# Allegro board Netduino3Ethernet_17Dec16.brd
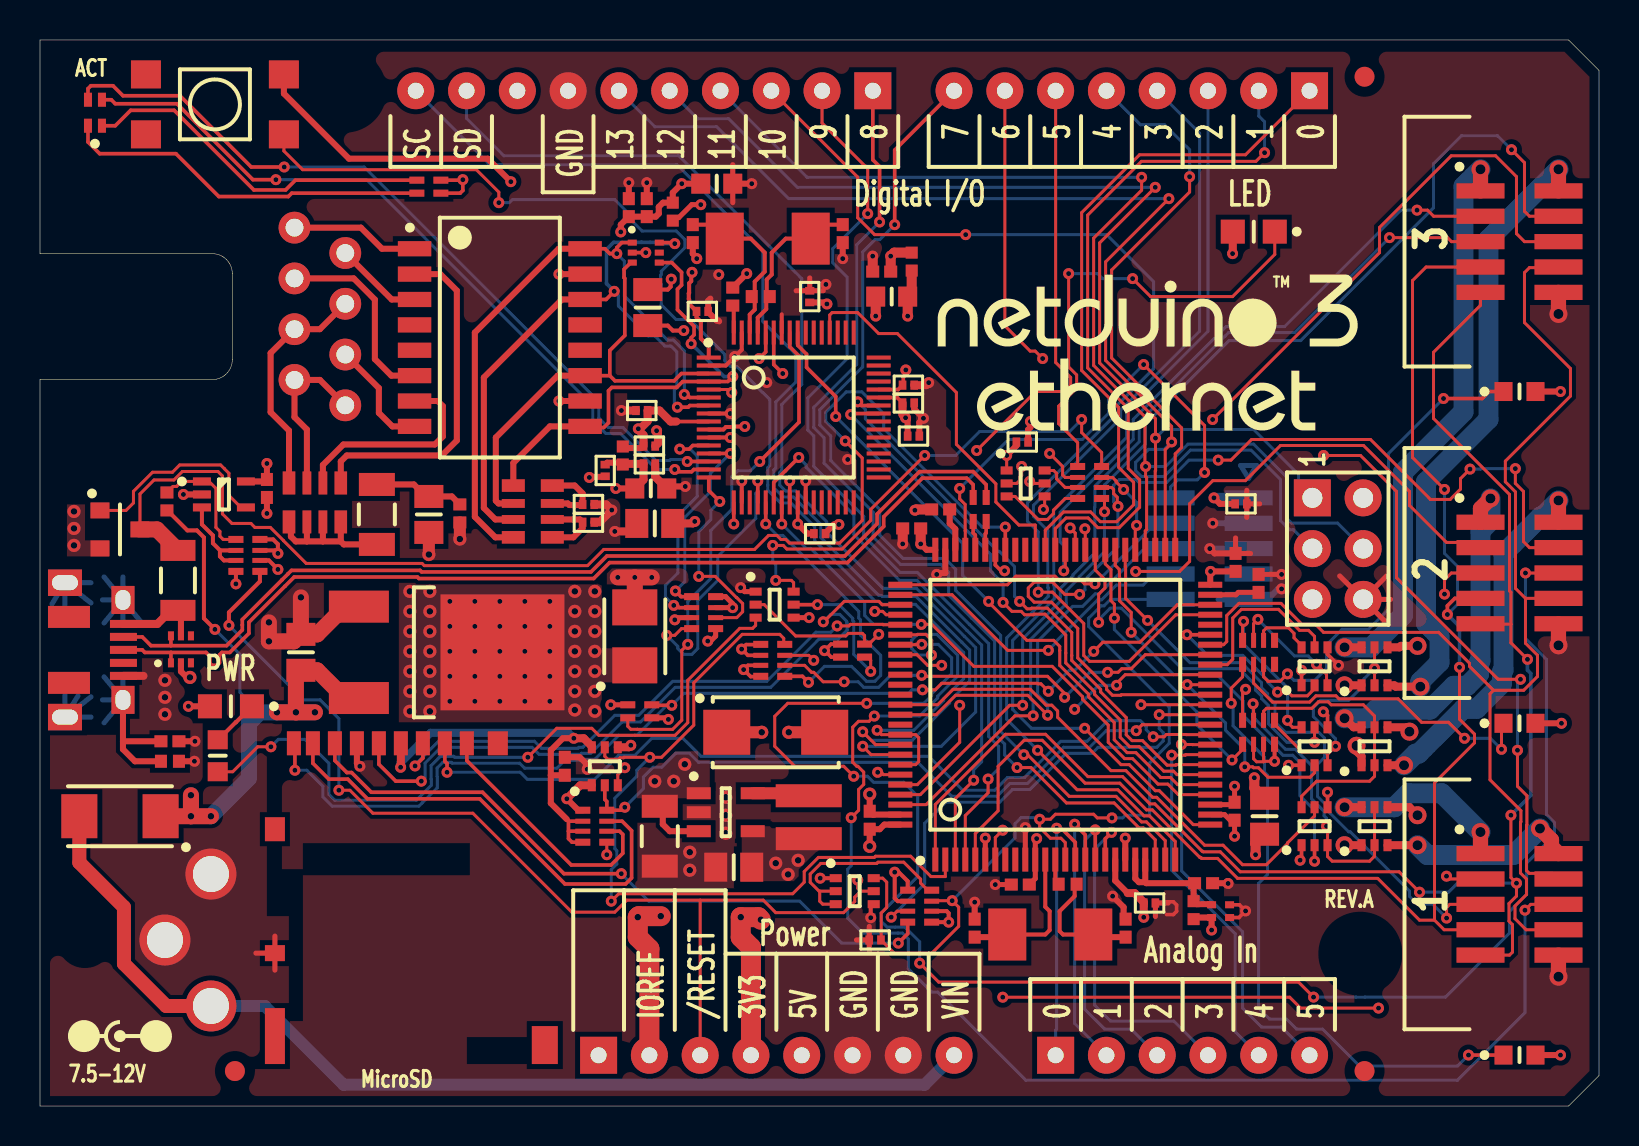
[diagram p0: board, top side]
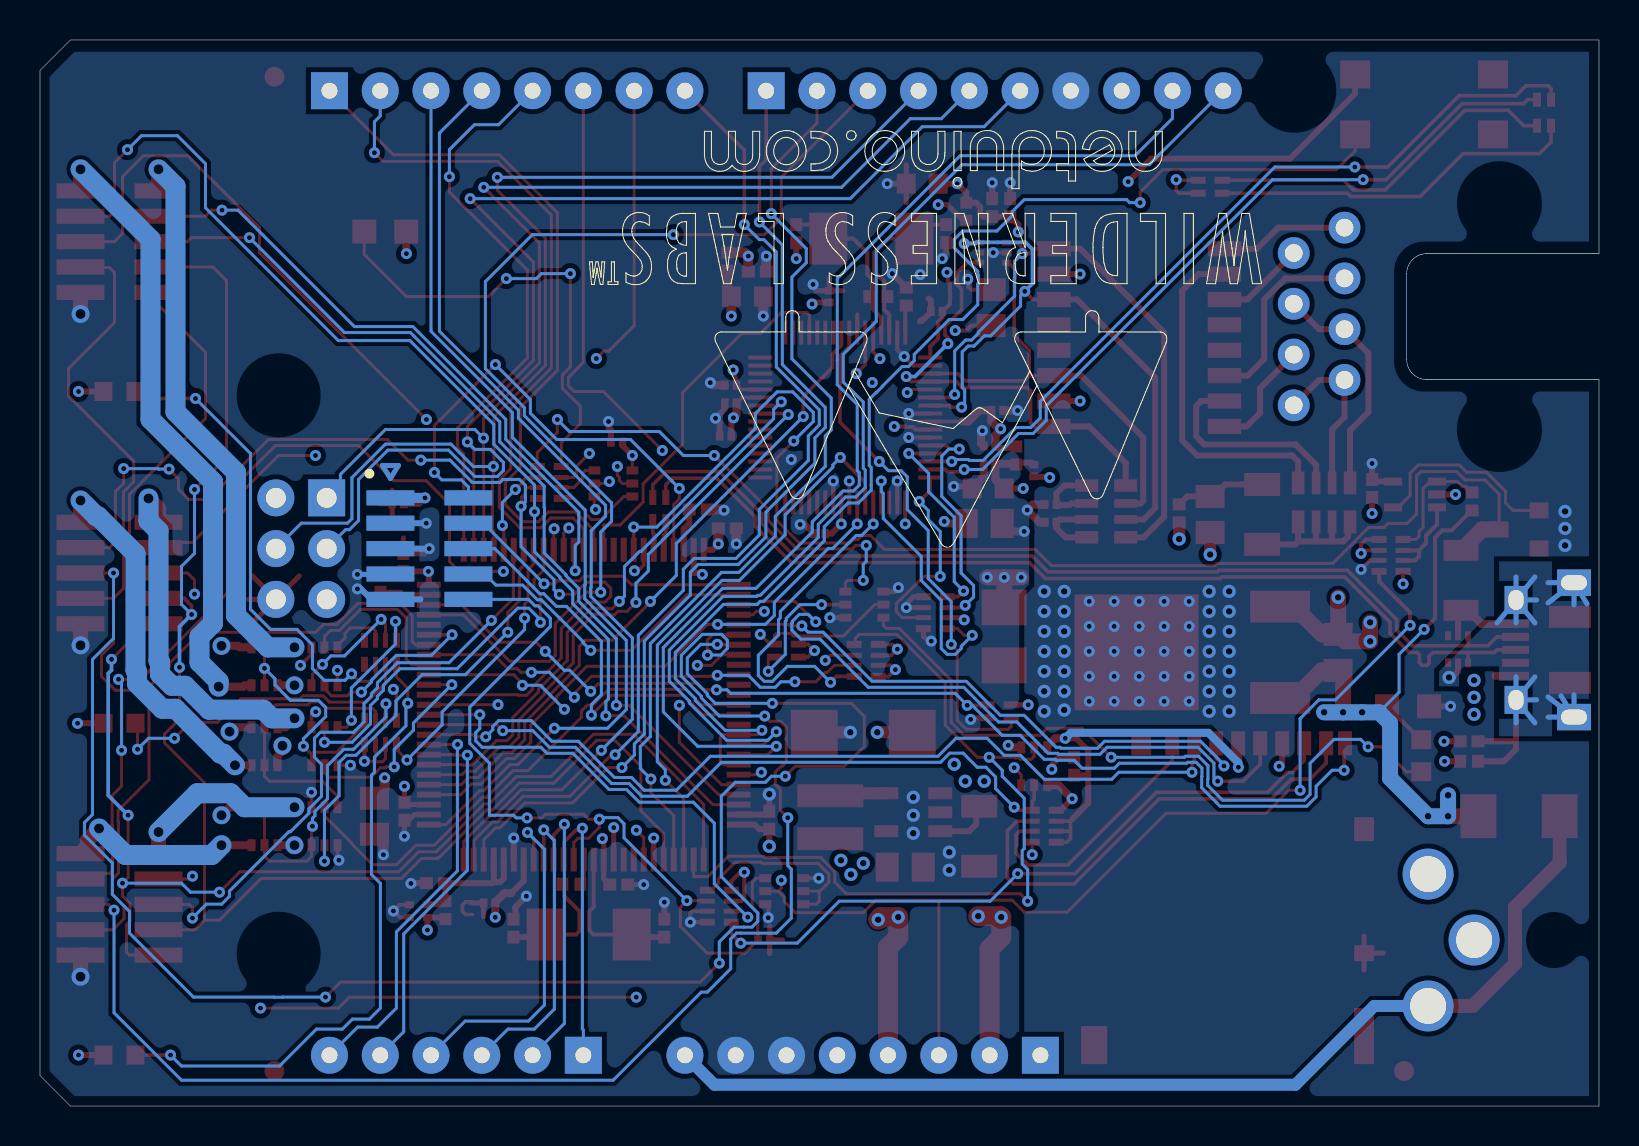
[diagram p1: board, bottom side, seen from below]

Outline 77.98 x 53.34 mm; copper layers: TOP, L2-GND, L3-PWR, BOTTOM. Coordinates in mm from the lower left corner of the outline.
Outline path: 0,53.34 0,42.65 8.62,42.65 arc(9.33,42.35) 9.62,41.65 9.62,37.35 arc(9.33,36.64) 8.62,36.35 0,36.35 0,0 76.45,0 77.98,1.52 77.98,51.82 76.45,53.34 0,53.34

## Placement (name value [footprint] x y rotation side)
C1  22uF  [CAPC3216X180N]  31 13.5 270 top
C2  10uF  [CAPC2012X125N]  13.05 22.7 90 top
C4  22uF  [CAPC2012X125N]  34.7 11.95 180 top
C5  0.1uF  [CAPC1005X55N]  58.2 11.15 0 top
C6  0.1uF  [CAPC1005X55N]  11.35 30.9 270 top
C7  1uF  [GNM1M2]  59.05 9.75 0 top
C9  0.1uF  [CAP-0201]  55.5 10.16 0 top
C10  0.1uF  [CAPC1005X55N]  49.03 11.08 180 top
C11  0.1uF  [CAPC1005X55N]  59.75 14.75 270 top
C12  0.1uF  [CAPC1005X55N]  59.8 27.2 90 top
C13  0.1uF  [CAPC1005X55N]  43.6 28.9 180 top
C14  0.1uF  [CAPC1005X55N]  41.5 14.3 90 top
C16  2.2uF  [CAPC1005X55N]  45.05 29.85 180 top
C17  2.2uF  [CAPC1005X55N]  60.95 26.15 90 top
C18  18pF  [CAPC1005X55N]  46.75 8.9 90 top
C19  18pF  [CAPC1005X55N]  54.3 8.9 90 top
C20  4.7nF  [CAPC1005X55N]  6.5 18.25 180 top
C21  100uF  [CAPMP6032X280N]  36.8 18.7 0 top
C22  0.1uF  [CAPC1005X55N]  26.25 17 90 top
C23  22uF  [CAPC2012X125N]  30.75 29.15 180 top
C24  0.1uF  [CAP-0201]  30.1 34.8 180 top
C25  22uF  [CAPC2012X125N]  30.4 39.95 90 top
C26  0.1uF  [CAP-0201]  33.13 39.76 0 top
C27  4.7uF  [CAPC1608X90N]  33.85 46.15 0 top
C28  1uF  [CAPC1005X55N]  30.35 44.95 90 top
C29  0.1uF  [CAPC1005X55N]  29.45 44.95 90 top
C30  0.1uF  [CAP-0201]  38.5 40.5 90 top
C31  0.1uF  [CAP-0201]  43.43 35.18 0 top
C32  0.1uF  [CAP-0201]  30.48 32.13 0 top
C33  0.1uF  [CAPC1005X55N]  42.1 41.75 180 top
C34  4.7uF  [CAPC1608X90N]  42.6 40.5 180 top
C35  0.1uF  [CAP-0201]  28.27 31.8 270 top
C36  4.7uF  [CAPC1608X90N]  30.55 30.9 0 top
C37  18pF  [CAPC1005X55N]  40.15 43.65 270 top
C38  18pF  [CAPC1005X55N]  32.65 43.65 270 top
C39  0.1uF  [CAP-0201]  27.43 30.1 0 top
C40  1nF  [CAPC3216X180N]  16.85 29.6 90 top
C41  0.1uF  [CAPC2012X125N]  19.45 29.6 90 top
C42  22uF  [CAPC2012X125N]  61.25 14.5 270 top
C43  47uF  [F931A476MBA]  29.75 23.5 90 top
C44  0.1uF  [CAP-0201]  41.77 8.31 180 top
C45  0.1uF  [CAP-0201]  60.07 30.13 0 top
C46  0.1uF  [CAP-0201]  49.13 33.22 0 top
C47  0.1uF  [CAP-0201]  39 28.64 0 top
C48  0.1uF  [CAP-0201]  43.43 36.07 0 top
C49  0.1uF  [CAP-0201]  43.69 33.52 0 top
C50  0.1uF  [CAP-0201]  30.48 33.02 0 top
C51  0.1uF  [CAP-0201]  27.43 29.21 0 top
D1  WHITE  [LEDC2012X110N]  9.55 20 180 top
D2  BLUE  [LEDC2012X110N]  60.71 43.75 180 top
D3  SS15E-TP  [SS15-TP]  4 14.5 180 top
D4  -  [SP3003-04XTG]  7.05 22.85 90 top
D5  BLUE  [LEDC1608X80N]  74 2.55 0 top
D6  BLUE  [LEDC1608X80N]  74 19.15 0 top
D7  BLUE  [LEDC1608X80N]  74 35.75 0 top
D8  -  [SP3003-04XTG]  30.3 42.7 0 top
D9  GREEN  [LTST-C295]  2.75 49.7 90 top
F1  MF-NSMF075-2  [RESC3216X100N]  6.9 26.3 90 top
F2  -  [FID_1-00_X_2-00]  9.75 1.75 0 top
F3  -  [FID_1-00_X_2-00]  66.25 1.75 0 top
F4  -  [FID_1-00_X_2-00]  66.25 51.5 0 top
J1  -  [ADC-043A-1]  8.55 8.31 90 top
J2  HDR100IMP08F-G-V-TH-BLUE  [HDR100IMP08F-G-V-TH]  63.5 50.8 180 top
J3  HDR100IMP08F-G-V-TH-BLUE  [HDR100IMP10F-G-V-TH]  41.66 50.8 180 top
J4  HDR100IMP08F-G-V-TH-BLUE  [HDR100IMP06F-G-V-TH]  50.8 2.54 0 top
J5  -  [DX4R005JJ2R1800]  0 22.82 270 top
J6  HDR100IMP08F-G-V-TH-BLUE  [HDR100IMP08F-G-V-TH]  27.94 2.54 0 top
J7  -  [67996-206HLF]  63.64 30.43 270 top
J8  -  [MINI_JTAG_SMD]  58.5 27.89 180 bottom
J9  DM3AT-SF-PEJM5  [DM3AT-SF-PEJ]  21.35 17.55 0 top
J10  HDR050IDC10MS2-G-V-SM-BLUE  [20021521-00010T1LF]  74 10.09 0 top
J11  HDR050IDC10MS2-G-V-SM-BLUE  [20021521-00010T1LF]  74 26.67 0 top
J12  HDR050IDC10MS2-G-V-SM-BLUE  [20021521-00010T1LF]  74 43.25 0 top
J13  -  [44661-0002]  0 39.5 270 top
L1  2.2uH  [LQH3NPN2R2NM0L]  38.45 14.45 270 top
L2  BEAD FERRITE/SM  [INDC1005X55N]  57.7 9.8 270 top
L3  BEAD FERRITE/SM  [INDC1005X55N]  31.65 44.75 90 top
L4  BEAD FERRITE/SM  [INDC1005X55N]  43.6 42.25 270 top
L5  BEAD FERRITE/SM  [INDC1005X55N]  29.15 32.55 90 top
MT1  -  [MTG320H420NP_720KO]  15.24 50.8 0 top
MT2  -  [MTG320H420NP_720KO]  66.04 35.56 0 top
MT3  -  [MTG320H420NP_720KO]  66.04 7.62 0 top
NOREF  -  []  4 3.5 0 top
NOREF#2  -  []  0 53.34 0 top
NOREF#3  -  []  0 0 90 top
NOREF#4  -  []  44.9 38 0 top
Q1  -  [MUN5215DW1T1G]  36.74 25.09 0 top
Q2  -  [MUN5215DW1T1G]  40.75 10.75 0 top
Q3  -  [NTR4101PT1G]  4 28.85 0 top
Q4  -  [NTJD4152PT1G]  28.25 17 90 top
Q5  -  [NTJD4152PT1G]  66.75 14 90 top
Q6  -  [MUN5215DW1T1G]  63.75 14 90 top
Q7  -  [NTJD4152PT1G]  66.75 18 90 top
Q8  -  [NTJD4152PT1G]  49.3 31.15 0 top
Q9  -  [NTJD4152PT1G]  66.75 22 90 top
Q10  -  [MUN5215DW1T1G]  63.75 18 90 top
Q11  -  [MUN5215DW1T1G]  63.75 22 90 top
R1  1K  [RESCAV50P80X160X60-8N]  52.5 31.2 0 top
R3  1.5K  [CAPC1608X90N]  8.89 17.53 270 top
R4  10K  [RESCAV50P80X160X60-8N]  10.4 27.55 0 top
R5  10K  [RESCAV50P80X160X60-8N]  44 10 0 top
R6  15.4K  [RESC1005X40AN]  6.35 30.25 90 top
R7  390  [RESC1005X40AN]  51.4 11.1 180 top
R8  100K  [EXB24V]  40.64 22.79 0 top
R9  22  [EXB24V]  47 29.85 270 top
R10  1M  [RESC1005X40AN]  6.5 17.25 180 top
R11  10K  [RESCAV50P80X160X60-8N]  27.75 14 0 top
R12  10K  [RESCAV50P80X160X60-8N]  60.95 18.7 90 top
R13  10K  [EXB24V]  30 19.75 0 top
R14  10K  [RESCAV50P80X160X60-8N]  36.65 22.3 0 top
R15  680  [RESCAV50P80X160X60-8N]  60.95 22.7 90 top
R16  1M  [RESC1005X40AN]  36.05 40.5 180 top
R17  49.9  [CRA06S]  24.65 29.75 0 top
R18  75  [CRA06S]  13.75 30.2 270 top
R19  10K  [RESCAV50P80X160X60-8N]  33.19 24.69 0 top
R20  1M  [RESC1005X40AN]  21 29.65 90 top
R21  12.1K  [RESC1005X40AN]  34.65 40.5 90 top
R22  1.5K  [EXB24V]  19.45 46 180 top
SW1  -  [TSXH-2GL]  8.75 50.12 0 top
T1  HX1198NLT  [HX1198NL]  23 38.45 0 top
U1  LM3671MF-3.3/NOPB  [LM3671MF]  34.3 14.7 0 top
U2  -  [TLV1117-50IKVURG3]  15.95 22.7 0 top
U3  -  [LMV321IDCKR]  9.2 30.6 0 top
U4  STM32F427  [STM32F427VIT6]  50.78 20.08 90 top
U5  -  [AX88796CLF]  37.7 34.45 0 top
Y1  25.00MHz  [ABM7]  50.53 8.58 180 top
Y2  25.00MHz  [ABM7]  36.4 43.4 0 top

## Library data of the parts
C1 C2 C4-C6 C9-C14 C16-C51 = C
C7 = GNM1M2
D1 = LED_2
D2 D5-D7 = LED_1
D3 = D05AZ75_0
D4 D8 = HEADER 6_0
D9 = LED0603_GREEN_STR_1
F1 = FUSE
F2-F4 MT1-MT3 = MOUNT_HOLE
J1 = HEADER 3
J2 J6 = HEADER 8
J3 = HEADER 10
J4 = HEADER 6
J5 = HEADER 11_0
J7 = HEADER 6_1
J8 J10-J12 = HEADER 10_2
J9 = HEADER 10_4
J13 = CONN_FPC10P_2
L1 = L
L2-L5 = BEAD FERRITE/SM
Q1 Q2 = MUN5215DW1T1G_3
Q3 = NDF0610/TO_1
Q4 Q5 Q7-Q9 = NTJD4152PT1G
Q6 Q10 Q11 = MUN5215DW1T1G_0
R1 R4 R5 R11 R12 R14 R15 R17-R19 = RESCAV50P80X160X60-8N
R3 R6 R7 R10 R16 R20 R21 = R
R8 R9 R13 R22 = EXB24V
SW1 = SW PUSHBUTTON-SPST-2_0
T1 = HX1198NLT_0
U1 = HEADER 5_0
U2 = LM7805/TO_2
U3 = LMV321/SO
U4 = STM32F427_0
U5 = AX88796CLF_1
Y1 Y2 = CRYSTAL

## Footprints (pads in the part's own frame, mm; a bottom-side part is the same pattern mirrored in y, then rotated)
44661-0002
  round 0 hole 3.25 unplated: (-5.65,4.98) (5.65,4.98)
  round 1.59 hole 0.89: 1(-4.45,12.73) 2(-3.18,15.27) 3(-1.91,12.73) 4(-0.64,15.27) 5(0.63,12.73) 6(1.9,15.27) 7(3.17,12.73) 8(4.44,15.27)
67996-206HLF
  rect 1.85x1.85 hole 1: 1(0,0)
  round 1.85 hole 1: 2(0,2.54) 3(2.54,0) 4(2.54,2.54) 5(5.08,0) 6(5.08,2.54)
20021521-00010T1LF
  rect 2.4x0.76 smd: 1(-1.95,2.54) 2(1.95,2.54) 3(-1.95,1.27) 4(1.95,1.27) 5(-1.95,0) 6(1.95,0) 7(-1.95,-1.27) 8(1.95,-1.27) 9(-1.95,-2.54) 10(1.95,-2.54)
ABM7
  rect 1.9x2.6 smd: 1(-2.15,0) 2(2.15,0)
ADC-043A-1
  round 0 hole 2.4 unplated: (0,6.3)
  round 2.55 hole 1.8: 1(-3.3,0) 2(0,2.3) 3(3.3,0)
AX88796CLF
  rect 1.2x0.2 smd: 1(-4.25,3) 2(-4.25,2.6) 3(-4.25,2.2) 4(-4.25,1.8) 5(-4.25,1.4) 6(-4.25,1) 7(-4.25,0.6) 8(-4.25,0.2) 9(-4.25,-0.2) 10(-4.25,-0.6) 11(-4.25,-1) 12(-4.25,-1.4) 13(-4.25,-1.8) 14(-4.25,-2.2) 15(-4.25,-2.6) 16(-4.25,-3) 33(4.25,-3) 34(4.25,-2.6) 35(4.25,-2.2) 36(4.25,-1.8) 37(4.25,-1.4) 38(4.25,-1) 39(4.25,-0.6) 40(4.25,-0.2) 41(4.25,0.2) 42(4.25,0.6) 43(4.25,1) 44(4.25,1.4) 45(4.25,1.8) 46(4.25,2.2) 47(4.25,2.6) 48(4.25,3)
  rect 0.2x1.2 smd: 17(-3,-4.25) 18(-2.6,-4.25) 19(-2.2,-4.25) 20(-1.8,-4.25) 21(-1.4,-4.25) 22(-1,-4.25) 23(-0.6,-4.25) 24(-0.2,-4.25) 25(0.2,-4.25) 26(0.6,-4.25) 27(1,-4.25) 28(1.4,-4.25) 29(1.8,-4.25) 30(2.2,-4.25) 31(2.6,-4.25) 32(3,-4.25) 49(3,4.25) 50(2.6,4.25) 51(2.2,4.25) 52(1.8,4.25) 53(1.4,4.25) 54(1,4.25) 55(0.6,4.25) 56(0.2,4.25) 57(-0.2,4.25) 58(-0.6,4.25) 59(-1,4.25) 60(-1.4,4.25) 61(-1.8,4.25) 62(-2.2,4.25) 63(-2.6,4.25) 64(-3,4.25)
CAP-0201
  rect 0.381x0.457 smd: 1(-0.292,0) 2(0.292,0)
CAPC1005X55N
  rect 0.65x0.6 smd: 1(-0.45,0) 2(0.45,0)
CAPC1608X90N
  rect 0.95x1 smd: 1(-0.8,0) 2(0.8,0)
CAPC2012X125N
  rect 1.15x1.45 smd: 1(-0.9,0) 2(0.9,0)
CAPC3216X180N
  rect 1.15x1.8 smd: 1(-1.5,0) 2(1.5,0)
CAPMP6032X280N
  rect 2.35x2.25 smd: 1(-2.45,0) 2(2.45,0)
CRA06S
  rect 1.15x0.63 smd: 1(-0.975,1.295) 4(-0.975,-1.295) 5(0.975,-1.295) 8(0.975,1.295)
  rect 1.15x0.44 smd: 2(-0.975,0.4) 3(-0.975,-0.4) 6(0.975,-0.4) 7(0.975,0.4)
DM3AT-SF-PEJ
  rect 0.7x1.2 smd: 1(0,0.6) 2(-1.1,0.6) 3(-2.2,0.6) 4(-3.3,0.6) 5(-4.4,0.6) 6(-5.5,0.6) 7(-6.6,0.6) 8(-7.7,0.6) 9(-8.65,0.6)
  rect 1x0.8 smd: 10(-9.6,-9.9)
  rect 1x1.2 smd: 11(-9.6,-3.7) 14(1.55,0.6)
  rect 1x2.8 smd: 12(-9.6,-14.05)
  rect 1.3x1.9 smd: 13(3.9,-14.5)
DX4R005JJ2R1800
  rect 0.4x1.35 smd: 1(-1.3,4.175) 2(-0.65,4.175) 3(0,4.175) 4(0.65,4.175) 5(1.3,4.175)
  rect 1.4x1.15 hole 1x0.75: 6(-2.5,4.15) 7(2.5,4.15)
  rect 1.325x1.7 hole 0.75x1.3: 8(-3.362,1.25) 11(3.362,1.25)
  rect 1.1x2.1 smd: 9(-1.65,1.45) 10(1.65,1.45)
EXB24V
  rect 0.75x0.35 smd: 1(-0.6,0.325) 2(-0.6,-0.325) 3(0.6,-0.325) 4(0.6,0.325)
F931A476MBA
  rect 1.8x2.25 smd: 1(-1.45,0) 2(1.45,0)
FID_1-00_X_2-00
  round 1 smd: 1(0,0)
GNM1M2
  rect 0.45x0.35 smd: 1(-0.45,0.32) 2(-0.45,-0.32) 3(0.45,-0.32) 4(0.45,0.32)
HDR100IMP06F-G-V-TH
  rect 1.85x1.85 hole 0.8: 1(0,0)
  round 1.85 hole 0.8: 2(2.54,0) 3(5.08,0) 4(7.62,0) 5(10.16,0) 6(12.7,0)
HDR100IMP08F-G-V-TH
  rect 1.85x1.85 hole 0.8: 1(0,0)
  round 1.85 hole 0.8: 2(2.54,0) 3(5.08,0) 4(7.62,0) 5(10.16,0) 6(12.7,0) 7(15.24,0) 8(17.78,0)
HDR100IMP10F-G-V-TH
  rect 1.85x1.85 hole 0.8: 1(0,0)
  round 1.85 hole 0.8: 2(2.54,0) 3(5.08,0) 4(7.62,0) 5(10.16,0) 6(12.7,0) 7(15.24,0) 8(17.78,0) 9(20.32,0) 10(22.86,0)
HX1198NL
  rect 1.67x0.76 smd: 1(-4.265,4.445) 2(-4.265,3.175) 3(-4.265,1.905) 4(-4.265,0.635) 5(-4.265,-0.635) 6(-4.265,-1.905) 7(-4.265,-3.175) 8(-4.265,-4.445) 9(4.265,-4.445) 10(4.265,-3.175) 11(4.265,-1.905) 12(4.265,-0.635) 13(4.265,0.635) 14(4.265,1.905) 15(4.265,3.175) 16(4.265,4.445)
INDC1005X55N
  rect 0.6x0.6 smd: 1(-0.45,0) 2(0.45,0)
LEDC1608X80N
  rect 0.899x0.95 smd: A(0.8,0) C(-0.8,0)
LEDC2012X110N
  rect 1.2x1.2 smd: A(1.05,0) C(-1.05,0)
LM3671MF
  rect 1.2x0.6 smd: 1(-1.35,0.95) 2(-1.35,0) 3(-1.35,-0.95) 4(1.35,-0.95) 5(1.35,0.95)
LMV321IDCKR
  rect 0.9x0.4 smd: 1(-1.1,0.65) 2(-1.1,0) 3(-1.1,-0.65) 4(1.1,-0.65) 5(1.1,0.65)
LQH3NPN2R2NM0L
  rect 1.15x3.3 smd: 1(-1.075,0) 2(1.075,0)
LTST-C295
  rect 0.7x0.4 smd: 1(-0.65,0.35) 2(-0.65,-0.35) 3(0.65,0.35) 4(0.65,-0.35)
MINI_JTAG_SMD
  rect 2.4x0.76 smd: 1(-1.95,2.54) 2(1.95,2.54) 3(-1.95,1.27) 4(1.95,1.27) 5(-1.95,0) 6(1.95,0) 7(-1.95,-1.27) 8(1.95,-1.27) 9(-1.95,-2.54) 10(1.95,-2.54)
MTG320H420NP_720KO
  round 0 hole 3.2 unplated: (0,0)
MUN5215DW1T1G
  rect 0.6x0.4 smd: 1(-0.95,0.65) 2(-0.95,0) 3(-0.95,-0.65) 4(0.95,-0.65) 5(0.95,0) 6(0.95,0.65)
NTJD4152PT1G
  rect 0.6x0.4 smd: 1(-0.95,0.65) 2(-0.95,0) 3(-0.95,-0.65) 4(0.95,-0.65) 5(0.95,0) 6(0.95,0.65)
NTR4101PT1G
  rect 0.95x0.8 smd: 1(-1,0.95) 2(-1,-0.95) 3(1,0)
RESC1005X40AN
  rect 0.6x0.65 smd: 1(-0.45,0) 2(0.45,0)
RESC3216X100N
  rect 1.05x1.75 smd: 1(-1.5,0) 2(1.5,0)
RESCAV50P80X160X60-8N
  rect 0.75x0.35 smd: 1(-0.6,0.8) 4(-0.6,-0.8) 5(0.6,-0.8) 8(0.6,0.8)
  rect 0.75x0.25 smd: 2(-0.6,0.25) 3(-0.6,-0.25) 6(0.6,-0.25) 7(0.6,0.25)
SP3003-04XTG
  rect 0.45x0.3 smd: 1(-0.675,0.5) 2(-0.675,0) 3(-0.675,-0.5) 4(0.675,-0.5) 5(0.675,0) 6(0.675,0.5)
SS15-TP
  rect 1.8x2.2 smd: A(2.032,0) C(-2.032,0)
STM32F427VIT6
  rect 1.2x0.3 smd: 1(-7.75,6) 2(-7.75,5.5) 3(-7.75,5) 4(-7.75,4.5) 5(-7.75,4) 6(-7.75,3.5) 7(-7.75,3) 8(-7.75,2.5) 9(-7.75,2) 10(-7.75,1.5) 11(-7.75,1) 12(-7.75,0.5) 13(-7.75,0) 14(-7.75,-0.5) 15(-7.75,-1) 16(-7.75,-1.5) 17(-7.75,-2) 18(-7.75,-2.5) 19(-7.75,-3) 20(-7.75,-3.5) 21(-7.75,-4) 22(-7.75,-4.5) 23(-7.75,-5) 24(-7.75,-5.5) 25(-7.75,-6) 51(7.75,-6) 52(7.75,-5.5) 53(7.75,-5) 54(7.75,-4.5) 55(7.75,-4) 56(7.75,-3.5) 57(7.75,-3) 58(7.75,-2.5) 59(7.75,-2) 60(7.75,-1.5) 61(7.75,-1) 62(7.75,-0.5) 63(7.75,0) 64(7.75,0.5) 65(7.75,1) 66(7.75,1.5) 67(7.75,2) 68(7.75,2.5) 69(7.75,3) 70(7.75,3.5) 71(7.75,4) 72(7.75,4.5) 73(7.75,5) 74(7.75,5.5) 75(7.75,6)
  rect 0.3x1.2 smd: 26(-6,-7.75) 27(-5.5,-7.75) 28(-5,-7.75) 29(-4.5,-7.75) 30(-4,-7.75) 31(-3.5,-7.75) 32(-3,-7.75) 33(-2.5,-7.75) 34(-2,-7.75) 35(-1.5,-7.75) 36(-1,-7.75) 37(-0.5,-7.75) 38(0,-7.75) 39(0.5,-7.75) 40(1,-7.75) 41(1.5,-7.75) 42(2,-7.75) 43(2.5,-7.75) 44(3,-7.75) 45(3.5,-7.75) 46(4,-7.75) 47(4.5,-7.75) 48(5,-7.75) 49(5.5,-7.75) 50(6,-7.75) 76(6,7.75) 77(5.5,7.75) 78(5,7.75) 79(4.5,7.75) 80(4,7.75) 81(3.5,7.75) 82(3,7.75) 83(2.5,7.75) 84(2,7.75) 85(1.5,7.75) 86(1,7.75) 87(0.5,7.75) 88(0,7.75) 89(-0.5,7.75) 90(-1,7.75) 91(-1.5,7.75) 92(-2,7.75) 93(-2.5,7.75) 94(-3,7.75) 95(-3.5,7.75) 96(-4,7.75) 97(-4.5,7.75) 98(-5,7.75) 99(-5.5,7.75) 100(-6,7.75)
TLV1117-50IKVURG3
  rect 3x1.6 smd: 1(0,2.286) 3(0,-2.286)
  rect 6.2x5.8 smd: 4(7.18,0)
TSXH-2GL
  rect 1.5x1.4 smd: 1(-3.45,1.5) 2(3.45,1.5) 3(-3.45,-1.5) 4(3.45,-1.5)

## Nets
3V3_GOPORT1: J10.1(3V3) Q5.6(DRAIN)
3V3_GOPORT2: J11.1(3V3) Q7.6(DRAIN)
3V3_GOPORT3: J12.1(3V3) Q9.6(DRAIN)
5V_GOPORT1: J10.2(5V) Q5.3(DRAIN)
5V_GOPORT2: J11.2(5V) Q7.3(DRAIN)
5V_GOPORT3: J12.2(5V) Q9.3(DRAIN)
+3.3V: C4.1 C7.2(1) C9.1 C10.1 C11.1 C12.1 C13.1 C14.1 C21.1 C23.1 C33.1 C42.1 C45.1 C46.1 J6.2 J6.4 J8.1(VCC) L1.2 L2.2 L3.1 L4.1 Q4.1(SOURCE) Q4.4(SOURCE) Q5.1(SOURCE) Q7.1(SOURCE) Q8.1(SOURCE) Q8.4(SOURCE) Q9.1(SOURCE) R4.4(1) R5.1 R5.2(1) R8.1 R8.2(1) R11.1 R13.1 R14.1 R14.2(1) R14.3(1) R14.4(1) R19.3(1) R22.1 R22.2(1) SW1.2 U1.4(FB) U4.6(VBAT) U4.11(VDD1) U4.19(VDD2) U4.28(VDD3) U4.50(VDD4) U4.75(VDD5) U4.100(VDD6) U5.10(VCC3R3)
+3V3_MICROSD: C22.1 J9.4(VDD) Q4.6(DRAIN) R11.2(1) R11.3(1) R11.4(1)
+5.0V: C1.1 C6.1 C43.1 D1.A(ANODE) D2.A(ANODE) D5.A(ANODE) D6.A(ANODE) D7.A(ANODE) J6.5 J7.2(VTG) Q3.2(SOURCE) Q5.4(SOURCE) Q7.4(SOURCE) Q9.4(SOURCE) R4.6(2) R12.2(1) R12.3(1) R12.4(1) U1.1(VIN) U1.3(EN) U2.4(VOUT) U3.5(+VCC)
+VIN: D3.A(1) J1.1 J6.8
+VIN_PROTECTED: C2.1 D3.C(2) R6.1 U2.3(VIN)
GND: C1.2 C2.2 C4.2 C5.2 C6.2 C7.3 C7.4(3) C9.2 C10.2 C11.2 C12.2 C13.2 C14.2 C16.2 C17.2 C18.2 C19.2 C20.1 C21.2 C22.2 C23.2 C24.2 C25.2 C26.2 C27.2 C28.2 C29.2 C30.2 C31.2 C32.2 C33.2 C34.2 C35.2 C36.2 C37.2 C38.2 C39.2 C41.1 C42.2 C43.2 C44.2 C45.2 C46.2 C47.2 C48.2 C49.2 C50.2 C51.2 D8.2(GND) J1.2 J1.3 J3.7 J5.5(GND) J6.6 J6.7 J7.6(GND) J8.3(GND1) J8.5(GND2) J8.7(GND3) J8.9(GND4) J9.6(VSS) J9.10(SW_GND) J10.10(GND) J11.10(GND) J12.10(GND) Q1.1(E) Q1.4(E) Q2.1(E) Q2.4(E) Q6.1(E) Q6.4(E) Q10.1(E) Q10.4(E) Q11.1(E) Q11.4(E) R4.7(2) R4.8(2) R5.5(2) R5.6(2) R10.1 R11.5(2) R12.8(2) R13.3(2) R19.5(2) R19.7(2) R19.8(2) R20.1 R21.2 U1.2(GND) U2.1(GND) U3.2(-VCC) U4.10(VSS1) U4.20(VSSA) U4.27(VSS2) U4.74(VSS3) U4.99(VSS4) U5.2(GND3A3) U5.8(GND18A#8) U5.11(GND3R3) U5.18(GND#18) U5.26(GND#26) U5.58(GND#58) U5.63(GND18A#63)
VCC3A3: C26.1 C27.1 C28.1 C29.1 L3.2 T1.10(CT_R) T1.15(CT_T) U5.1(VCC3A3)
VCC18: C24.1 C25.1 C30.1 C31.1 C49.1 C50.1 L5.2 U5.9(V18F) U5.24(VCCK#24) U5.43(VCCK#43) U5.59(VCCK#59)
VCC18A: C32.1 C35.1 C36.1 L5.1 U5.5(VCC18A#5) U5.60(VCC18A#60)
VCCIO: C34.1 C47.1 C48.1 L4.2 U5.25(VCCIO#25) U5.44(VCCIO#44)
VDDA: C5.1 C7.1 L2.1 U4.21(VREF+) U4.22(VDDA)
VIN_COMP: R4.1 R6.2 U3.1(+VIN)
VIN_COMP_LOGIC: Q3.1(GATE) U3.4(OUT)
VIN_REF: R4.2(1) R4.3(1) U3.3(-VIN)
/AX_CS: U4.65(PC8) U5.52(SSN)
/AX_INT: U4.29(PA4) U5.23(IRQ)
/AX_RESET: R5.3(1) U4.37(PB2) U5.17(RSTN)
/ENABLE_UART_TX_PULLUP_GOPORT1: Q4.5(GATE) R14.8(2) U4.2(PE3)
/ENABLE_UART_TX_PULLUP_GOPORT2: Q8.2(GATE) R14.7(2) U4.41(PE10)
/ENABLE_UART_TX_PULLUP_GOPORT3: Q8.5(GATE) R14.6(2) U4.43(PE12)
/EXTERNAL_RESET: J6.3 J7.5(R\E\S\E\T\) Q2.5(B) R4.5(2)
/INT_GOPORT1: J10.3(GIPO) U4.60(PD13)
/INT_GOPORT2: J11.3(GIPO) U4.61(PD14)
/INT_GOPORT3: J12.3(GIPO) U4.62(PD15)
/LINK_ACT: D9.3(CATHODE_GREEN) U5.14(I_LK/ACT)
/MICRO_SD_CARD_INSERTED: J9.9(C\A\R\D\_\I\N\_\S\W\) R13.4(2) U4.48(PB11)
/MICROSD_CS: J9.2(C\S\) U4.35(PB0)
/PWR_CTRL_GOPORT1: Q5.2(GATE) Q5.5(GATE) Q6.3(C) R12.7(2)
/PWR_CTRL_GOPORT2: Q6.6(C) Q7.2(GATE) Q7.5(GATE) R12.6(2)
/PWR_CTRL_GOPORT3: Q9.2(GATE) Q9.5(GATE) Q10.3(C) R12.5(2)
/PWR_CTRL_MICROSD: Q4.2(GATE) R11.8(2) U4.36(PB1)
/RESET_MCU: C44.1 J8.10(NRST) Q2.6(C) R5.7(2) U4.14(NRST)
/SPEED: D9.4(CATHODE_YELLOW) U5.15(I_SPEED)
/SPI_CS_GOPORT1: J10.6(SPI_CS) U4.81(PD0)
/SPI_CS_GOPORT2: J11.6(SPI_CS) U4.82(PD1)
/SPI_CS_GOPORT3: J12.6(SPI_CS) U4.83(PD2)
A0: J4.1 U4.15(PC0)
A1: J4.2 U4.16(PC1)
A2: J4.3 U4.17(PC2)
A3: J4.4 U4.18(PC3)
A4: J4.5 U4.33(PC4)
A5: J4.6 U4.34(PC5)
AX_MISO: U4.31(PA6) U5.41(MISO)
AX_MOSI: U4.32(PA7) U5.42(MOSI)
AX_SCK: U4.30(PA5) U5.56(SPI_CLK)
AX_WAKE_UP: U4.3(PE4) U5.22(PME)
CHASSIS_ETHERNET: C40.2 C41.2 R20.2
CHASSIS_USB: C20.2 D4.2(GND) J5.6(CHS1) J5.7(CHS2) J5.8(CHS3) J5.11(CHS4) R10.2
D0: J2.1 U4.64(PC7)
D1: J2.2 U4.63(PC6)
D2: J2.3 U4.26(PA3)
D3: J2.4 U4.25(PA2)
D4: J2.5 U4.51(PB12)
D5: J2.6 U4.95(PB8)
D6: J2.7 U4.96(PB9)
D7: J2.8 U4.24(PA1)
D8: J3.1 U4.23(PA0)
D9: J3.2 U4.4(PE5)
D10: J3.3 U4.47(PB10)
D11: J3.4 J7.4(MOSI) U4.54(PB15)
D12: J3.5 J7.1(MISO) U4.53(PB14)
D13: J3.6 J7.3(SCK) U4.52(PB13)
JTCK: J8.4(JTCK) U4.76(PA14)
JTDI: J8.8(JTDI) U4.77(PA15)
JTDO: J8.6(JTDO) U4.89(PB3)
JTMS: J8.2(JTMS) U4.72(PA13)
LED: Q1.2(B) R8.4(2) U4.69(PA10)
LED_GOPORT1: Q10.2(B) U4.40(PE9)
LED_GOPORT2: Q11.5(B) U4.42(PE11)
LED_GOPORT3: Q11.2(B) U4.45(PE14)
OSC_IN: C18.1 U4.12(PH0) Y1.2
OSC_OUT: R7.2 U4.13(PH1)
OTG_FS_DM: R9.4(2) U4.70(PA11)
OTG_FS_DP: R9.3(2) U4.71(PA12)
PWR_LED: Q1.5(B) R8.3(2) U4.7(PC13)
PWR_ON_GOPORT1: Q6.5(B) U4.88(PD7)
PWR_ON_GOPORT2: Q6.2(B) U4.57(PD10)
PWR_ON_GOPORT3: Q10.5(B) U4.59(PD12)
RD+: D8.3(I/O2) R17.2(1) T1.11(RD+) U5.3(TPI+)
RD-: D8.4(I/O3) R17.1 T1.9(RD-) U5.4(TPI-)
RSET_BG: R21.1 U5.64(RSET_BG)
RX+: J13.3(RX+) T1.6(RX+)
RX-: J13.6(RX-) T1.8(RX-)
SCL: J3.10 U4.92(PB6)
SDA: J3.9 U4.93(PB7)
SPI3_MISO: J9.7(DO) R5.4(1) U4.79(PC11)
SPI3_MOSI: J9.3(DI) U4.80(PC12)
SPI3_SCK: J9.5(CLK) U4.78(PC10)
SPI4_MISO: J10.8(SPI_MISO) J11.8(SPI_MISO) J12.8(SPI_MISO) U4.44(PE13)
SPI4_MOSI: J10.7(SPI_MOSI) J11.7(SPI_MOSI) J12.7(SPI_MOSI) U4.5(PE6)
SPI4_SCK: J10.9(SPI_SCK) J11.9(SPI_SCK) J12.9(SPI_SCK) U4.1(PE2)
SWITCH1: R12.1 SW1.4 U4.58(PD11) U4.91(PB5) U4.94(BOOT0)
TD+: D8.1(I/O1) R17.4(1) T1.16(TD+) U5.6(TPO+)
TD-: D8.6(I/O4) R17.3(1) T1.14(TD-) U5.7(TPO-)
TX+: J13.1(TX+) T1.1(TX+)
TX-: J13.2(TX-) T1.3(TX-)
USART3_RX_GOPORT1: J10.5(USART_RX) U4.56(PD9)
USART3_TX_GOPORT1: J10.4(USART_TX) R1.7(2) U4.55(PD8)
USART7_RX_GOPORT2: J11.5(USART_RX) U4.38(PE7)
USART7_TX_GOPORT2: J11.4(USART_TX) R1.6(2) U4.39(PE8)
USART8_RX_GOPORT3: J12.5(USART_RX) U4.97(PE0)
USART8_TX_GOPORT3: J12.4(USART_TX) R1.5(2) U4.98(PE1)
USB5V: D4.5(VCC) F1.1 J5.1(VBUS)
USB5V_F: F1.2 Q3.3(DRAIN) U4.68(PA9)
USB_D+: D4.1(I/O1) J5.3(D+) R9.2(1)
USB_D-: D4.6(I/O4) J5.2(D-) R9.1
VCAP_1: C17.1 U4.49(VCAP_1)
VCAP_2: C16.1 U4.73(VCAP_2)
XTALIN: C37.1 R16.1 U5.61(XTALIN) Y2.2
XTALOUT: C38.1 R16.2 U5.62(XTALOUT) Y2.1
N332853: Q2.2(B) Q2.3(C) R5.8(2)
N332873: L1.1 U1.5(SW)
N332891: D2.C(CATHODE) R1.1
N333149: Q1.6(C) R1.8(2)
N333173: D1.C(CATHODE) R3.1
N333175: Q1.3(C) R3.2
N333299: C19.1 R7.1 Y1.1
N333445: J9.1(NC) R11.6(2)
N333449: J9.8(RSV) R11.7(2)
N337920: Q10.6(C) R15.8(2)
N337928: D5.C(CATHODE) R15.1
N337930: Q11.3(C) R15.7(2)
N337938: D6.C(CATHODE) R15.2(1)
N337940: Q11.6(C) R15.6(2)
N337948: D7.C(CATHODE) R15.3(1)
N337960: Q4.3(DRAIN) R1.2(1)
N337994: Q8.6(DRAIN) R1.3(1)
N338028: Q8.3(DRAIN) R1.4(1)
N338320: R19.2(1) U5.12(TEST2)
N338324: R19.1 U5.13(TEST1)
N338328: R13.2(1) U5.57(TEST_CK_EN)
N338332: R19.6(2) U5.16(I_FULL/COL)
N338402: R14.5(2) U5.21(EECS/GPIO3_1)
N338408: R19.4(1) U5.20(EECK/GPIO2_1)
N338436: C51.1 R17.5(2) R17.6(2)
N338444: C39.1 R17.7(2) R17.8(2)
N338526: J13.4 J13.5 R18.4(1)
N338532: J13.7 J13.8 R18.3(1)
N338540: R18.1 T1.2(CX_T)
N338544: R18.2(1) T1.7(RX_T)
N338558: C40.1 R18.5(2) R18.6(2) R18.7(2) R18.8(2)
N3392501: D9.1(ANODE_GREEN) R22.4(2)
N3395001: D9.2(ANODE_YELLOW) R22.3(2)

Pads without a net: D4 3 4; D8 5; F2 1; F3 1; F4 1; J3 8; J5 4 9 10; J6 1; J9 11 12 13 14; R15 4 5; SW1 1 3; T1 4 5 12 13; U4 8 9 46 66 67 84 85 86 87 90; U5 19 27 28 29 30 31 32 33 34 35 36 37 38 39 40 45 46 47 48 49 50 51 53 54 55

## Via types
v1: diameter 0.55, hole 0.25, TOP to BOTTOM, 344 vias
v2: diameter 0.9, hole 0.5, TOP to BOTTOM, 21 vias
v3: diameter 0.66, hole 0.33, TOP to BOTTOM, 65 vias

## Routing (per net, layer and track width the routed paths; a pad name or vN(x,y) marks a point on that pad's centre or on a via; arc(x,y) is an arc through that point)
3V3_GOPORT1: length 9.8
  TOP w0.4: Q5.6 v2(65.25,14.95)
  TOP w0.76: J10.1 v2(72.05,13.71)
  BOTTOM w1: v2(65.25,14.95) 67.74,14.95 68.44,15.65 70.11,15.65 v2(72.05,13.71)
3V3_GOPORT2: length 19.1
  TOP w0.4: Q7.6 65.7,18.95 v2(65.25,19.4)
  TOP w0.76: v2(72.55,30.4) 72.05,29.9 J11.1
  BOTTOM w1: v2(65.25,19.4) 66.38,19.4 66.81,19.83 69.52,19.83 70.71,21.02 71.38,21.02 71.97,21.62 71.97,22.21 72.05,22.28 72.05,28.77 72.55,29.27 v2(72.55,30.4)
3V3_GOPORT3: length 29.4
  TOP w0.4: Q9.6 v2(65.25,22.95)
  TOP w0.76: J12.1 v2(72.05,46.87)
  BOTTOM w1: v2(72.05,46.87) 71.2,46.02 71.2,34.73 68.17,31.71 68.17,24.55 66.57,22.95 v2(65.25,22.95)
5V_GOPORT1: length 10
  TOP w0.4: Q5.3 v2(68.9,13.05)
  TOP w0.76: J10.2 75.6,12.98 75.6,13.31 v2(75.02,13.89)
  BOTTOM w1: v2(68.9,13.05) 69.39,12.56 73.7,12.56 v2(75.02,13.89)
5V_GOPORT2: length 18.9
  TOP w0.4: Q7.3 v2(68.22,17.05)
  TOP w0.76: v2(75.95,30.3) J11.2
  BOTTOM w1: v2(75.95,30.3) 75.15,29.5 75.07,29.5 73.2,27.64 73.2,21.81 73.12,21.73 73.12,21.14 71.86,19.88 71.2,19.88 68.95,17.63 68.81,17.63 v2(68.22,17.05)
5V_GOPORT3: length 32.1
  TOP w0.4: v2(69.04,20.98) 67.81,20.98 67.74,21.05 Q9.3
  TOP w0.76: J12.2 v2(75.95,46.87)
  BOTTOM w1: v2(75.95,46.87) 72.45,43.37 72.45,34.36 69.33,31.23 69.33,24.16 70,23.48 70,22.2 69.04,21.24 v2(69.04,20.98)
+3.3V: length 82.9
  TOP w0.15: Q8.4 50.25,29.89 50.19,29.89 v1(50.19,29.85) ; Q8.1 v1(48.35,32.55)
  TOP w0.18: R14.2 35.41,22.55 v1(35.09,22.86) 35.32,23.09 36.04,23.09 R14.1 ; R14.4 36.04,21.49 35.54,21.49 v1(35.19,21.84) 35.41,22.05 R14.3 ; R8.1 39.57,23.11 v1(39.24,22.78) 39.36,22.66 39.38,22.66 39.58,22.46 R8.2 ; R22.1 21.02,45.67 21.15,45.81 v1(21.15,46.35) 21.05,46.35 21.02,46.33 R22.2
  TOP w0.2: R5.1 43.4,11.25 42.95,11.7 v1(42.75,11.7) 42.75,10.4 42.9,10.25 R5.2 ; U5.10 34.18,33.85 34.31,33.98 34.67,33.98 34.7,34 v1(35.25,34) ; R4.4 v1(9.8,26.12)
  TOP w0.25: v1(33.05,45.1) 32.6,45.1 31.95,44.45 31.8,44.45 L3.1 ; v1(49.85,13.38) 49.85,13.35 49.78,13.28 U4.11 49.78,11.38 C10.1 ; U4.28 59.63,15.08 C11.1 v1(59.75,16) ; v1(31.75,24.33) 31.74,24.33 31.74,24.44 R19.3 ; R13.1 v1(28.55,20.07) ; U4.6 v1(47.28,13.41)
  TOP w0.3: C45.1 59.02,30.13 v1(58.72,30.43) ; C46.1 48.84,33.04 v1(48.35,32.55) ; v3(41.5,12.99) C14.1 42,13.85 42.23,14.08 U4.100 ; U4.75 44.34,27.83 v1(44.05,28.12) ; v1(26.35,15.38) 26.93,14.8 R11.1 ; L2.2 57.78,9.43 C7.2 v1(58.6,8.8) ; v1(23.55,46.25) 22.4,47.4 15.46,47.4 12.2,50.66 SW1.2 ; 54.4,10.65 53.78,11.28 U4.19 ; U4.50 58.53,26.73 58.55,26.75 v1(58.55,26.75) C12.1
  TOP w0.4: v1(32.75,29.25) 32.65,29.15 C23.1 ; v1(26.35,15.38) 27.02,16.05 Q4.1 ; v1(29.55,18.05) 29.45,17.95 Q4.4 ; 54.4,10.65 54.75,10.65 55.21,10.2 C9.1 v1(55.21,9.44) ; Q9.1 v2(65.25,21.05) ; Q5.1 v2(65.25,13.05) ; Q7.1 66.1,17.5 65.85,17.75 v2(65.85,18.03)
  TOP w0.5: v1(60.74,16.43) 60.74,15.91 C42.1 ; L4.1 42.73,42.7 v1(42.55,42.52) C33.1 ; C13.1 v1(44.05,28.12)
  TOP w0.6: C21.1 v3(36.1,18.7)
  TOP w1: J6.2 30.48,7.86 29.9,8.44 v3(29.9,9.45) 29.95,9.5 v3(31.05,9.5) ; v3(36.06,9.32) 35.93,9.45 v3(35.05,9.45) 35.05,8.44 35.56,7.93 J6.4
  BOTTOM w0.5: J8.1 v1(58.72,30.43)
  vias: v3(36.8,12.15) v3(37.42,11.59) v3(37.92,12.29)
+3V3_MICROSD: length 21.1
  TOP w0.18: R11.4 26.61,13.2 26.43,13.38 26.43,13.75 ; 26.35,14.35 26.43,14.27 ; 26.43,14.27 26.43,13.75 ; 26.43,14.27 26.45,14.25 R11.2 ; 26.43,13.75 R11.3
  TOP w0.3: v1(26.7,18.4) 26.15,18.4 25.55,17.8 25.55,16.55 ; 25.55,16.55 C22.1 ; 25.55,16.55 25.55,15.15 26.35,14.35
  TOP w0.4: v1(26.7,18.4) 27.2,18.4 27.6,18 Q4.6 ; J9.4 18.05,16.96 v1(18.04,16.95)
  BOTTOM w0.4: v1(26.7,18.4) 26.43,18.68 19.54,18.68 18.04,17.18 v1(18.04,16.95)
+5.0V: length 27.6
  TOP w0.15: R12.2 60.7,17.38 60.85,17.23 61.2,17.23 61.23,17.25 ; 61.23,17.25 61.2,17.27 R12.3 ; 61.23,17.25 v1(61.75,17.25)
  TOP w0.18: C1.1 31.15,14.85
  TOP w0.2: v1(11.9,26.85) 11.45,27.3 R4.6 ; R12.4 v1(61.75,17.25)
  TOP w0.3: D6.A v1(76.1,19.15) ; U3.5 11.25,31.25 C6.1 v1(11.35,32.15) ; D7.A v1(76.05,35.75) ; D1.A v1(7.42,20) ; D5.A v1(76.05,2.55) ; U1.3 31.5,13.75 31.15,14.1 31.15,14.85
  TOP w0.4: v2(68.5,18.73) 68.5,18.83 68.38,18.95 Q7.4 ; v1(59.65,42.65) 59.66,42.66 D2.A ; Q9.4 68,22.95 68.08,23.02 v2(68.9,23.02) ; Q5.4 68.5,14.95 v2(68.9,14.55)
  L3-PWR w0.254: J7.2 66.18,31.8 ; J7.2 67.55,30.43 ; J7.2 67.35,29.26 ; J7.2 67.35,31.6 ; J7.2 65.01,31.6
  vias: v1(20.5,25.25) v1(20.5,24) v1(20.5,22.75) v1(20.5,21.5) v1(20.5,20.25) v1(21.75,25.25) v1(21.75,24) v1(21.75,22.75) v1(21.75,21.5) v1(21.75,20.25) v1(23,25.25) v1(23,24) v1(23,22.75) v1(23,21.5) v1(23,20.25) v1(24.25,25.25) v1(24.25,24) v1(24.25,22.75) v1(24.25,21.5) v1(24.25,20.25) v1(25.5,25.25) v1(25.5,24) v1(25.5,22.75) v1(25.5,21.5) v1(25.5,20.25) v3(1.7,29.75) v3(1.7,28.9) v3(1.7,28.05) v3(18.5,25.75) v3(18.5,24.75) v3(18.5,23.75) v3(18.5,22.75) v3(18.5,21.75) v3(18.5,20.75) v3(18.5,19.75) v3(19.5,25.75) v3(19.5,24.75) v3(19.5,23.75) v3(19.5,22.75) v3(19.5,21.75) v3(19.5,20.75) v3(19.5,19.75) v3(26.75,25.75) v3(26.75,24.75) v3(26.75,23.75) v3(26.75,22.75) v3(26.75,21.75) v3(26.75,20.75) v3(26.75,19.82) v3(27.75,25.75) v3(27.75,24.75) v3(27.75,23.75) v3(27.75,22.75) v3(27.75,21.75) v3(27.75,20.75) v3(27.75,19.75) v3(30.75,16.25) v3(31.7,16.25) v3(32.25,17.1)
+VIN: length 52.9
  TOP w0.7: D3.A 1.97,12.18 4.2,9.95 4.2,7.12 6.31,5.01 J1.1
  BOTTOM w0.6: J6.8 44.24,1.06 15.19,1.06 11.24,5.01 J1.1
+VIN_PROTECTED: length 34.5
  TOP w0.2: v1(8.75,23.85) 8.2,24.4 8.2,28.45 7.85,28.8 7.38,28.8 6.38,29.8 R6.1
  TOP w0.8: v3(12.8,19.7) 12.8,21.55 C2.1 13.86,21.8 15.25,20.41 U2.3 ; v3(12.8,19.7) v3(13.75,19.7) ; v3(12.8,19.7) v3(11.85,19.7) ; v3(7.55,14.5) v3(7.55,15.55) ; v3(7.55,14.5) v3(8.55,14.5) ; v3(7.55,14.5) D3.C
  BOTTOM w0.15: v1(8.75,23.85) 10,22.6 10,20.7 11,19.7
  BOTTOM w0.8: v3(13.75,19.7) v3(12.8,19.7) v3(11.85,19.7) 11,19.7 10.45,19.15 10.45,16.4 v3(8.55,14.5) v3(7.55,14.5) v3(7.55,15.55)
GND: length 132.1
  TOP w0.15: v1(60.3,20.85) 60.15,20.7 R12.8 ; R11.5 v1(28.35,12.57)
  TOP w0.18: v1(64.95,22.05) 64.4,22.6 Q11.4 ; Q6.1 63.1,12.31 63.03,12.31 v1(63.03,12.3) ; v1(64.19,19.73) 64.22,19.73 64.4,19.55 Q10.4 ; Q6.4 v1(64.4,15.7) ; Q10.1 v1(62.45,17.05) ; C7.4 59.99,10.07 v1(60.3,9.76) 59.97,9.43 C7.3 ; 56.35,9.58 56.69,9.58 56.85,9.74 56.85,10.06 56.69,10.22 56.35,10.22 ; D8.2 v1(30.3,42.7) ; v1(63.1,21.8) Q11.1
  TOP w0.2: U5.8 v1(34.52,34.65) ; R5.6 45.35,9.75 45.45,9.65 v1(45.45,9.2) R5.5 ; v1(31.57,41.37) 31.55,41.34 31.55,40.99 31.4,40.85 C25.2 ; U5.26 v1(38.3,31.27) ; U5.63 35.1,37.84 34.76,37.5 v1(34.75,37.5) 34.3,37.05 U5.2 ; Q2.1 v1(39.02,11.4) ; Q2.4 41.55,9.95 v1(41.55,9.42) ; R4.7 11.75,27.8 v1(11.9,27.65) 11.9,28.11 11.66,28.35 R4.8 ; U5.18 v1(35.1,31.27) ; U5.58 37.1,39.61 ; U5.11 v1(34.52,33.45)
  TOP w0.25: R19.5 33.79,23.51 33.54,23.26 v1(33.4,23.26) ; U4.27 59.25,14.58 59.53,14.3 C11.2 v1(59.75,13.5) ; v1(31.43,19.34) 31.45,19.36 31.45,19.43 R13.3 ; U4.10 v1(49.28,13.93) ; R19.7 v1(34.64,24.94) 34.64,25.14 34.29,25.49 R19.8 ; Q1.4 v1(38.47,24.44) ; v1(35.04,25.94) 35.24,25.74 Q1.1 ; C17.2 v1(62.1,26.6) ; C10.2 v1(47.78,11.08)
  TOP w0.254: J7.6 67.35,26.52 ; J7.6 65.01,26.52 ; J7.6 67.55,25.35 ; J7.6 67.35,24.18 ; C45.2 61,30.13 ; C45.2 60.36,30.81 ; C45.2 60.36,29.45 ; 41.48,7.63 C44.2 ; C44.2 40.84,8.31 ; C44.2 41.48,8.99 ; 59.8,28.42 C12.2 60.55,27.65 ; 34.65,47.1 C27.2 34.65,45.2 ; 55.79,9.48 C9.2 56.43,10.16 ; 11.75,6.8 J9.10 ; J9.10 11.75,8.5 ; J9.10 10.8,7.65 ; C30.2 38.5,41.43 ; C30.2 37.82,40.79 ; C30.2 39.18,40.79
  TOP w0.3: J9.6 15.85,17.15 v1(16,17) ; C6.2 v1(11.35,29.65) ; C12.2 58.75,27.65 v1(58.51,27.89) ; v1(59.42,11.14) 59.41,11.15 C5.2 ; v1(39.31,41.11) 39.31,41.05 ; v1(32.85,42.4) 32.85,42.45 32.65,42.65 C38.2 ; v1(39.96,29.1) 39.71,29.1 39.29,28.68 C47.2 ; C49.2 43.98,34.2 v1(44.19,34.41) 43.73,34.87 C31.2 ; v1(27.48,31.45) 27.51,31.48 28.24,31.48 C35.2 ; U4.74 45.28,26.67 44.92,26.67 v1(44.85,26.6) ; C27.2 v1(35.6,46.15) ; 33.97,39.26 33.93,39.3 33.84,39.3 33.42,39.72 C26.2 33.42,40.29 33.53,40.4 ; C20.1 v1(7.75,18.25) ; v1(27.37,16.85) 27.3,16.92 27.3,17.15 27,17.45 C22.2 ; v1(35.35,41.65) R21.2 ; v3(41.5,15.61) C14.2 41.67,14.58 U4.99 ; C18.2 v1(46.75,10.2) ; R10.1 v1(7.72,17.25) ; v1(32.27,31) 31.45,31 C36.2 ; C46.2 49.42,33.84 49.54,33.96 v1(49.54,34.25) ; C37.2 v1(40.15,42.4) ; U4.20 v1(54.28,13.41) ; 53.74,10.5 v1(53.65,10.5) 54.2,9.95 54.2,9.45 C19.2 ; C29.2 v1(29.45,46.2) ; U3.2 v1(7.17,30.6) ; C28.2 v1(30.35,46.2)
  TOP w0.4: v1(30.84,33.79) 30.91,33.72 30.91,33.16 C50.2 ; C36.2 30.77,31.48 C32.2 ; C39.2 28.32,30.1 v1(28.6,29.82) 27.99,29.21 C51.2 ; v1(44.45,36.2) 44.32,36.07 C48.2 ; J5.5 5.18,21.52 ; C24.2 v1(29.08,34.8) ; v1(28.75,28.75) 29.45,28.75 C23.2
  TOP w0.5: v1(43.76,29.81) 43.8,29.81 43.84,29.85 C16.2 ; C42.2 60.8,13.15 v1(60.8,12.57) ; C33.2 v1(41.65,42.52) ; C13.2 v1(43.15,28.12) ; C34.2 v1(41.8,39.52)
  TOP w0.6: R20.1 v3(21,28.37) ; C41.1 v3(19.45,27.59) ; C21.2 v3(37.45,18.7)
  TOP w0.76: J12.10 v2(75.95,39.63) ; J10.10 v2(75.95,6.47) ; J11.10 v2(75.95,23.05)
  TOP w0.8: C2.2 13.86,23.6 15.25,24.99 U2.1 ; C2.2 12.7,23.25 v3(11.45,23.25) v3(11.45,24.2) ; C2.2 v3(13.05,25.45) ; C43.2 v1(29.75,26.45) ; v1(29.75,26.45) v1(28.9,26.45) ; v1(29.75,26.45) v1(30.6,26.45)
  L2-GND w0.254: J7.6 67.35,24.18 ; J7.6 67.35,26.52 ; J7.6 67.55,25.35 ; J7.6 65.01,26.52
  BOTTOM w0.25: v1(62.1,26.6) 60.47,26.6 J8.7
  BOTTOM w0.3: 58.95,25.35 J8.9 61.4,25.35 61.92,25.88 v1(62.1,25.88) ; J8.3 v1(58.66,29.16) ; J8.5 v1(58.51,27.89)
  vias: v1(33.95,41.6) v1(36.35,36.2) v1(40.4,32.35) v3(6.25,21.3) v3(6.25,20.45) v3(6.25,19.6) v3(32.5,12.7) v3(32.5,11.8) v3(34.3,15.45) v3(34.3,14.55) v3(34.3,13.65)
VCC3A3: length 13.1
  TOP w0.2: U5.1 33.45,38.01 33.05,38.4 33.05,39.24 32.84,39.46 C26.1 32.47,40.13 32.47,40.36 32.45,40.38 32.45,40.66 32.47,40.68 32.47,41.17 32.57,41.27 32.57,41.68 v1(32.61,41.71)
  TOP w0.3: C27.1 v1(32.1,46.15) 31.65,45.7 L3.2 31.16,45.2 30.95,44.99 30.95,44.65 30.8,44.5 C28.1 C29.1 29.05,44.1 v1(29.05,43.74) ; T1.15 v1(25.95,41.62) ; T1.10 v1(25.95,35.27)
VCC18: length 15.7
  TOP w0.18: U5.59 36.7,37.1 v1(37.15,36.65) ; 31.83,34.25 U5.9 ; C31.1 42.87,35.45 U5.43 ; U5.24 v1(37.5,31.27)
  TOP w0.2: C25.1 31.4,39.05 31.65,38.8 v1(32.2,38.8)
  TOP w0.3: v1(39.36,40.13) 39.28,40.21 C30.1 ; v1(43.29,34.44) 43.4,34.33 C49.1 ; C50.1 30.09,32.92 29.23,32.92 L5.2
  TOP w0.4: v1(43.29,34.44) 43.14,34.59 C31.1 ; C50.1 30.19,33.57 29.93,33.83 v1(29.93,33.89) 29.95,33.86 29.99,33.86 30.39,34.26 C24.1 30.99,34.8 31.54,34.25 31.83,34.25
VCC18A: length 7
  TOP w0.15: U5.5 34.43,35.85 34.5,35.78 34.52,35.78 v1(34.6,35.7)
  TOP w0.18: U5.60 36.3,37.73 v1(35.97,37.4)
  TOP w0.3: C35.1 28.37,32.19 29.06,32.19 L5.1 ; C36.1 v1(28.8,30.9)
  TOP w0.4: L5.1 29.18,32.13 C32.1 30.19,31.34 C36.1
VCCIO: length 6.6
  TOP w0.18: 43.31,36.61 43.18,36.48 43.18,36.11 C48.1 42.92,35.85 U5.44 ; U5.25 v1(37.9,29.12)
  TOP w0.25: 43.31,36.61 v1(43.31,36.83)
  TOP w0.3: C47.1 38.38,28.64 v1(37.9,29.12)
  TOP w0.5: v1(43.4,39.52) C34.1 43.6,40.7 L4.2
VDDA: length 7
  TOP w0.3: 55.28,11.2 55.33,11.15 C5.1 57.7,11.1 L2.1 57.85,10.1 58.57,10.1 C7.1 ; 55.28,11.2 54.96,11.2 54.78,11.38 U4.21 ; 55.28,11.2 U4.22
VIN_COMP: length 6.2
  TOP w0.15: R6.2 6.65,31 6.83,31 7.08,31.25 U3.1 8.45,31.25 8.8,30.9 8.8,28.95 9,28.75 9,28.51 9.16,28.35 R4.1
VIN_COMP_LOGIC: length 10.1
  TOP w0.15: Q3.1 4.3,29.8 4.67,30.18 4.67,30.76 5.63,31.71 6.62,31.71 6.99,32.08 9.03,32.08 9.22,31.88 9.45,31.66 9.45,30.55 10.05,29.95 U3.4
VIN_REF: length 4.5
  TOP w0.2: 9,27.81 9,27.5 9.2,27.3 R4.3 ; 9,27.81 8.65,28.16 8.65,28.55 8.1,29.1 U3.3 ; 9,27.81 9.01,27.8 R4.2
/AX_CS: length 18.9
  TOP w0.15: U5.52 39.5,39.58 39.62,39.7 40.9,39.7 41.95,38.65 42.88,38.65 45.84,35.7 45.84,33.11 47.81,31.13 47.81,30.22 48.96,29.07 49.78,29.07 U4.65
/AX_INT: length 29.1
  TOP w0.15: v1(44.08,24.1) 44.61,24.1 46.71,22 50.63,22 52.15,20.48 52.15,20.35 53.43,19.06 53.43,18.2 54.25,17.38 54.65,17.38 55.92,16.11 56.41,16.11 56.94,15.58 U4.29
  TOP w0.18: U5.23 v1(37.1,29.12)
  BOTTOM w0.15: v1(44.08,24.1) 41.69,24.1 41.25,24.54 41.25,25.2 38.55,27.9 38.33,27.9 v1(37.1,29.12)
/AX_RESET: length 70.7
  TOP w0.15: U4.37 v1(55.98,19.58) ; R5.3 42.88,9.75 v1(42.58,9.45)
  TOP w0.18: U5.17 v1(34.7,29.12)
  L2-GND w0.15: v1(34.7,29.12) 35.59,29.12 36.09,29.62 41.09,29.62 43.52,32.05 45.91,32.05 46.52,31.44 46.52,27.18 45.24,25.89 38.56,25.89 37.51,24.84 37.34,24.67 37.34,21.14 39.65,18.83 39.65,11.42 40.57,10.5 41.53,10.5 v1(42.58,9.45)
  BOTTOM w0.15: v1(42.58,9.45) 44.25,11.12 44.25,14.15 45.3,15.2 48,15.2 48.64,15.84 49.51,15.84 51.32,17.65 52.62,17.65 52.92,17.95 55.86,17.95 56.18,18.27 56.18,18.68 55.98,18.88 v1(55.98,19.58)
/ENABLE_UART_TX_PULLUP_GOPORT1: length 41
  TOP w0.15: U4.2 45.28,11.48 44.56,11.48 43.55,12.5 41.79,12.5 41.73,12.44 38.93,12.44 38.23,11.73 38.23,11.2 37.65,10.62 28.95,10.62 v1(28.57,10.25) ; R14.8 37.2,23.15 37.2,23.4 37,23.6 35.12,23.6 32.7,21.18 32.7,19.06 31.09,17.45 v1(30.5,17.45) 29.22,17.45 29.19,17.43 29.02,17.43 28.94,17.35 28.4,17.35 28.25,17.5 Q4.5
  BOTTOM w0.15: v1(30.5,17.45) 29.85,16.8 29.85,16.5 28.75,15.4 28.75,12.88 28.85,12.78 28.85,12.11 28.57,11.83 v1(28.57,10.25)
/ENABLE_UART_TX_PULLUP_GOPORT2: length 42.6
  TOP w0.15: Q8.2 48.85,31.15 49,31.3 49,31.46 49.1,31.56 v1(49.1,32) ; R14.7 38.45,22.55 v1(38.7,22.3) ; U4.41 54.28,21.58 53.85,21.15 v1(53.85,21.05)
  L2-GND w0.15: 43.6,22.75 44.15,22.2 44.24,22.2 45.5,20.94 45.5,19.84 45.79,19.55 46.95,19.55 47.95,20.55 49.36,20.55 49.85,20.06 50.61,20.06 50.81,19.85 v1(51.75,19.85) ; 43.6,22.75 43.6,23.31 43.89,23.6 45.05,23.6 46.4,24.95 46.4,25.33 47.35,26.28 48.45,26.28 49.15,26.98 49.15,30.05 50,30.9 50,31.46 49.46,32 v1(49.1,32) ; 43.6,22.75 41.1,22.75 40.75,22.4 40.75,21.05 40.4,20.7 40,20.7 39.25,21.45 39.25,21.75 v1(38.7,22.3)
  BOTTOM w0.15: v1(53.85,21.05) 52.95,21.05 v1(51.75,19.85)
/ENABLE_UART_TX_PULLUP_GOPORT3: length 39.9
  TOP w0.15: v1(44.1,21.55) 44.3,21.55 44.35,21.5 50.4,21.5 51.25,20.65 v1(51.25,20.45) ; U4.43 55.28,22.58 54.58,21.88 54.11,21.88 53.92,21.7 v1(53.4,21.7) ; v1(40.22,21.23) 39.17,21.23 38.7,21.7 38.59,21.7 38.24,22.05 R14.6 ; v1(49.5,31.25) 49.6,31.15 Q8.5
  L2-GND w0.15: v1(49.5,31.25) 48.98,31.25 47.48,29.76 47.48,27.27 45.12,24.9 43.25,24.9 42.6,24.25 41.89,24.25 40.22,22.58 v1(40.22,21.23)
  BOTTOM w0.15: v1(53.4,21.7) 52.5,21.7 v1(51.25,20.45) ; v1(44.1,21.55) 42.55,21.55 41.95,20.95 41.2,20.95 40.92,21.23 v1(40.22,21.23)
/EXTERNAL_RESET: length 119
  TOP w0.15: 41.05,10.75 40.75,10.45 40.75,10.23 40.19,9.68 36.8,9.68 36.18,10.3 33.02,10.3 ; 41.05,10.75 Q2.5 ; 41.05,10.75 40.9,10.9 v1(40.9,11.3) ; v1(48.16,5.45) 62.51,5.45 63.05,4.9 v1(66.95,4.9) ; 33.02,10.3 J6.3 ; 33.02,10.3 29.35,10.3 28.75,9.7 26.6,9.7 21.65,14.65 16.65,14.65 15.5,15.8 v1(14.95,15.8)
  TOP w0.2: R4.5 11,26.25 9.45,24.7 v1(9.45,24.05)
  L2-GND w0.15: v1(48.16,5.45) 42.3,11.3 v1(40.9,11.3) ; v1(66.95,4.9) 68.9,4.9 72.9,8.9 72.9,16.04 69.8,19.14 69.8,22.75 70.9,23.85 70.9,26.8 70.5,27.2 70.05,27.2 69.1,26.25 69.1,25.38 67.55,23.83 65.75,23.83 65.65,23.93 65.06,23.93 J7.5
  BOTTOM w0.15: v1(14.95,15.8) 14.95,19.38 14.01,20.32 13.18,20.32 v1(9.45,24.05)
/INT_GOPORT1: length 34.4
  TOP w0.15: U4.60 52.28,28.86 52.26,28.86 v1(52.26,28.88) ; J10.3 70.49,11.36 v1(70.35,11.5)
  L2-GND w0.15: v1(52.26,28.88) 52.26,26.76 50.95,25.45 50.95,21.55 53.15,19.35 54.97,19.35 55.34,18.98 59.22,18.98 61.85,16.35 64.8,16.35 68.22,12.93 68.22,12.77 68.62,12.38 69.47,12.38 v1(70.35,11.5)
/INT_GOPORT2: length 30
  TOP w0.15: v1(51.53,28.92) 51.78,28.67 U4.61 ; J11.3 71.79,28.2 70.35,28.2 68.5,30.05 68.5,30.75 66.2,33.05 62.05,33.05 60.29,31.29 58.66,31.29 57.5,30.13 57.5,27.25 57,26.75 v1(54.8,26.75)
  L2-GND w0.15: v1(54.8,26.75) 53.05,28.5 53.05,28.8 52.47,29.38 51.98,29.38 v1(51.53,28.92)
/INT_GOPORT3: length 32.1
  TOP w0.15: J12.3 69.7,44.52 69.4,44.83 v1(68.88,44.83) ; U4.62 51.28,26.86 v1(51.21,26.78)
  BOTTOM w0.15: v1(51.21,26.78) 51.21,28.04 51.03,28.22 51.03,29.71 54.68,33.36 54.68,34.36 59.06,38.73 59.33,39 62.25,39 68.08,44.83 v1(68.88,44.83)
/LINK_ACT: length 40
  TOP w0.18: v1(12.21,46.98) 10.56,46.98 7,50.55 4.15,50.55 3.65,51.05 2.55,51.05 2.4,50.9 D9.3 ; U5.14 v1(32.38,32.25)
  BOTTOM w0.15: v1(12.21,46.98) 16.21,46.98 27.95,35.25 27.95,34.42 28.42,33.95 29.16,33.95 30.81,32.3 31.49,32.3 31.54,32.35 32.27,32.35 v1(32.38,32.25)
/MICRO_SD_CARD_INSERTED: length 54.6
  TOP w0.15: v1(44.14,20.83) 44.78,20.83 45.1,21.15 49.9,21.15 49.93,21.12 50.06,21.12 v1(50.43,20.75) ; v1(52.71,22.75) 53.16,23.21 55.01,23.21 56.89,25.08 U4.48
  TOP w0.18: v1(31.6,20.05) 30.62,20.05 R13.4 ; J9.9 12.75,18.1 v1(12.75,16.8)
  BOTTOM w0.15: v1(44.14,20.83) 43.61,20.83 43.44,20.65 32.2,20.65 v1(31.6,20.05) 31.35,20.05 29.85,18.55 28.95,18.55 27.75,17.35 27.21,17.35 27.16,17.3 26.25,17.3 25.85,16.9 24.24,16.9 23.99,17.15 20.62,17.15 20.57,17.2 20.15,17.2 19.86,16.91 19.86,16.49 19.87,16.48 19.87,15.92 19.13,15.18 18.95,15 14.62,15 14.15,15.47 14.15,16 13.35,16.8 v1(12.75,16.8) ; v1(52.71,22.75) 51.76,21.8 51.48,21.8 v1(50.43,20.75)
/MICROSD_CS: length 43.7
  TOP w0.15: U4.35 57.33,18.58 57.32,18.59 56.34,18.59 56.22,18.48 v1(55.68,18.48)
  TOP w0.18: v1(20.36,16.7) 20.36,17.14 20.25,17.25 J9.2
  BOTTOM w0.15: v1(20.36,16.7) 24.02,16.7 24.37,16.35 27.74,16.35 28.94,17.55 29.76,17.55 30.61,18.4 32.16,18.4 33.06,17.5 44.45,17.5 46.15,15.8 47.75,15.8 48.39,16.44 49.24,16.44 51.06,18.25 52.37,18.25 53.41,19.28 55.04,19.28 55.33,18.99 55.33,18.83 v1(55.68,18.48)
/PWR_CTRL_GOPORT1: length 15.3
  TOP w0.15: v1(60.67,20.12) 60.67,20.12 60.7,20.09 R12.7 ; Q5.5 Q5.2 66.75,12.5 66.5,12.25 64.64,12.25 64.4,12.48 Q6.3 64.4,13.95 v1(64.35,14)
  BOTTOM w0.15: v1(60.67,20.12) 60.67,19.47 62.29,17.85 62.78,17.85 63.6,17.03 63.6,15.37 64.22,14.74 64.22,14.53 64.35,14.4 v1(64.35,14)
/PWR_CTRL_GOPORT2: length 14.1
  TOP w0.15: Q6.6 63.1,15.5 63.85,16.25 66.5,16.25 66.75,16.5 Q7.2 Q7.5 66.75,19.52 66.19,20.07 64.58,20.07 64.43,20.23 63.94,20.23 63.62,19.9 61.35,19.9 61.2,19.75 R12.6
/PWR_CTRL_GOPORT3: length 12.9
  TOP w0.15: R12.5 61.75,19.1 63.15,17.7 64.3,17.7 64.4,17.6 ; 64.4,17.6 v1(64.8,18) ; 64.4,17.6 Q10.3 ; Q9.2 v1(66.75,21.9) Q9.5
  BOTTOM w0.15: v1(64.8,18) 64.8,18.37 63.69,19.49 63.69,19.93 64.06,20.3 65.45,20.3 66.22,21.07 66.22,21.38 v1(66.75,21.9)
/PWR_CTRL_MICROSD: length 35.4
  TOP w0.15: v1(54.83,18.78) 55.13,19.08 U4.36
  TOP w0.18: v1(29.25,14.95) 29.1,14.8 R11.8 28.35,15.24 28.25,15.34 Q4.2
  BOTTOM w0.15: v1(54.83,18.78) 53.33,18.78 52.5,17.95 51.2,17.95 49.39,16.14 48.51,16.14 47.88,15.5 45.6,15.5 43.9,17.2 32.94,17.2 32.48,17.66 31.81,17.66 31.1,16.95 30.66,16.95 30.18,16.46 30.18,15.88 v1(29.25,14.95)
/RESET_MCU: length 42.5
  TOP w0.15: U4.14 51.28,13.18 51.06,13.4 50.54,13.4 50,13.94 v1(50,14.35) 50.54,14.35 50.79,14.6 52.7,14.6 52.88,14.42 v1(53.62,14.42) ; 42.08,8.32 42.08,8.3 42.72,7.65 44.61,7.65 45.95,8.99 45.95,9.95 v1(45.62,10.28) 44.62,10.28 R5.7 ; 42.08,8.32 42.08,9.66 42.35,9.93 42.35,11.2 42.15,11.4 Q2.6 ; 42.08,8.32 C44.1
  BOTTOM w0.15: v1(53.62,14.42) 54.16,14.42 54.29,14.55 55.5,14.55 55.5,17.16 56.48,18.14 56.48,19.96 52.45,23.99 52.45,24.41 53.07,25.03 53.22,25.03 53.54,25.35 J8.10 ; v1(45.62,10.28) 48.77,13.42 48.77,14.12 49.07,14.43 49.92,14.43 v1(50,14.35)
/SPEED: length 38.5
  TOP w0.18: v1(11.8,46.35) 10.65,46.35 6.85,50.15 3.77,50.15 3.56,50.35 D9.4 ; v1(31.75,31.85) 31.86,31.73 32.59,31.73 32.7,31.85 U5.15
  BOTTOM w0.15: v1(11.8,46.35) 16.33,46.35 27.65,35.03 27.65,34.3 28.3,33.65 28.55,33.65 29.03,33.65 30.83,31.85 v1(31.75,31.85)
/SPI_CS_GOPORT1: length 70.9
  TOP w0.15: v1(41.73,19.51) 41.47,19.25 40.94,19.25 40.65,18.96 40.65,17.2 40.85,17 40.91,17 41.2,16.71 41.2,16.09 40.94,15.84 40.94,14.79 v1(40.57,14.42) ; J10.6 74.56,10.09 v1(74.28,9.8) ; U4.81 43.88,23.58 43.9,23.6 44.31,23.6 44.6,23.31 44.6,22.89 44.55,22.84 44.55,22.6 v1(44.59,22.56)
  BOTTOM w0.15: v1(44.59,22.56) 43.93,22.56 43.6,22.89 43.6,23.31 43.89,23.6 44.85,23.6 45.9,22.55 45.9,21.51 44.9,20.51 44.9,20.42 43.99,19.51 v1(41.73,19.51) ; v1(74.28,9.8) 74.28,4.67 70.9,1.29 49.31,1.29 44.9,5.7 44.6,5.7 43.43,6.87 43.43,8.36 43.14,8.65 42.91,8.65 41.15,8.65 40.4,9.4 40.4,11.85 40.57,12.02 v1(40.57,14.42)
/SPI_CS_GOPORT2: length 86.3
  TOP w0.15: v1(44,7.15) 44.95,6.2 62.95,6.2 v1(63.7,5.45) ; U4.82 43.78,23.08 43.8,23.1 v1(44.1,23.1) ; J11.6 v1(74.3,26.67) ; v1(40.7,16.5) 40.2,17 37.75,17 36.75,18 36.75,19.5 37.4,20.15 v1(41.35,20.15)
  BOTTOM w0.15: v1(44.1,23.1) 44.93,23.1 45.6,22.43 45.6,21.63 44.6,20.63 44.6,20.54 44.21,20.15 v1(41.35,20.15) ; v1(44,7.15) 44,8.21 43.26,8.95 42.78,8.95 42.78,8.95 42.37,8.95 42.08,9.24 42.08,9.66 43.9,11.48 43.9,15.5 43.2,16.2 41.69,16.2 41.39,16.5 v1(40.7,16.5) ; v1(74.3,26.67) 74.3,23.4 75.35,22.35 75.35,14.59 75.75,14.19 75.75,13.55 74.36,12.16 74.36,10.59 73.5,9.73 73.5,8.65 70.3,5.45 66.28,5.45 66.25,5.45 65.83,5.45 65.82,5.45 v1(63.7,5.45)
/SPI_CS_GOPORT3: length 59.4
  TOP w0.15: v1(58.65,34.35) 67,42.7 67,43.96 70.59,47.55 72.81,47.55 73.85,46.5 73.85,43.65 74.25,43.25 J12.6 ; v1(45.1,22.05) 44.4,22.05 43.87,22.58 U4.83
  L2-GND w0.15: v1(45.1,22.05) 45.62,22.05 46.85,23.28 46.85,25.36 47.47,25.98 48.58,25.98 50.7,28.1 50.7,29.27 51.05,29.62 51.05,33.2 50.55,33.7 50.55,36 49.65,36.9 49.65,37.61 49.94,37.9 55.11,37.9 55.7,37.31 55.7,37.3 v1(58.65,34.35)
A0: length 13.5
  TOP w0.18: v1(50.85,13.9) 50.95,13.8 51.18,13.8 51.78,13.2 U4.15
  BOTTOM w0.15: v1(50.85,13.9) 50.85,3.85 50.8,3.81 J4.1
A1: length 14.2
  TOP w0.18: v1(51.75,14.1) 52.28,13.57 U4.16
  BOTTOM w0.15: J4.2 51.75,4.13 v1(51.75,14.1)
A2: length 15.3
  TOP w0.18: U4.17 v1(52.78,13.82)
  BOTTOM w0.15: J4.3 54.57,3.85 53.25,3.85 52.25,4.85 52.25,13.29 v1(52.78,13.82)
A3: length 17.2
  TOP w0.18: U4.18 53.28,13.37 53.59,13.69 v1(53.59,13.69)
  BOTTOM w0.15: J4.4 56.71,4.25 53.55,4.25 52.75,5.05 52.75,12.85 v1(53.59,13.69)
A4: length 18.8
  TOP w0.15: v1(56.6,17.56) 57.28,17.56 57.31,17.58 U4.33
  BOTTOM w0.15: v1(56.6,17.56) 56.6,11.8 59.78,8.61 59.78,3.71 J4.5
A5: length 20.2
  TOP w0.15: v1(57.09,18.09) 57.63,18.09 57.64,18.08 U4.34
  BOTTOM w0.15: v1(57.09,18.09) 57.1,18.08 57.1,17.35 57.1,17.35 57.1,11.76 60.15,8.71 60.15,4.9 61.1,3.95 62.09,3.95 J4.6
AX_MISO: length 29.3
  TOP w0.15: v1(48.17,25.2) 48.62,24.75 49.08,24.75 49.25,24.58 49.69,24.58 49.72,24.61 50.26,24.61 51.31,23.57 51.31,22.67 51.31,22.17 52.75,20.73 52.75,20.59 54.03,19.31 54.03,18.45 54.5,17.98 54.98,17.98 56.21,16.76 56.69,16.76 56.87,16.58 U4.31
  TOP w0.18: U5.41 40.6,34.65 v1(40.55,34.6)
  BOTTOM w0.15: v1(40.55,34.6) 47.55,27.6 47.55,26.77 48.17,26.15 v1(48.17,25.2)
AX_MOSI: length 28.9
  TOP w0.15: U4.32 56.83,17.08 56.81,17.06 56.37,17.06 55.15,18.28 54.62,18.28 54.33,18.57 54.33,19.44 53.05,20.72 53.05,20.85 51.61,22.29 51.61,22.54 51.61,23.69 50.39,24.91 49.6,24.91 49.57,24.88 49.37,24.88 v1(49,25.25)
  TOP w0.18: U5.42 41.09,35.05 v1(40.9,35.23)
  BOTTOM w0.15: v1(49,25.25) 48.75,25.5 48.75,26.99 47.98,27.75 47.92,27.75 41.28,34.38 41.28,34.85 v1(40.9,35.23)
AX_SCK: length 33.4
  TOP w0.15: U4.30 56.9,16.08 56.55,16.44 56.06,16.44 54.81,17.68 54.38,17.68 53.73,18.33 53.73,19.19 52.45,20.47 52.45,20.6 51.01,22.05 51.01,22.79 51.01,22.99 50.7,23.3 49.36,23.3 47.45,25.21 v1(47.45,25.25)
  TOP w0.18: v1(39.8,34.5) 39.8,35.5 38.34,36.96 38.34,37.62 37.9,38.06 U5.56
  BOTTOM w0.15: v1(47.45,25.25) 46.15,26.55 46.15,28.15 v1(39.8,34.5)
AX_WAKE_UP: length 27.7
  TOP w0.15: U4.3 45.78,15.38 v1(46.7,16.3)
  TOP w0.18: U5.22 36.7,31.2 36.98,31.48 36.98,31.49 37.29,31.79 37.29,31.79 v1(37.95,32.45)
  BOTTOM w0.15: v1(37.95,32.45) 38.32,32.08 38.32,31.96 40.71,29.57 40.71,28.58 42.99,26.3 43.86,26.3 46.36,23.8 47.1,23.06 47.1,17.23 46.7,16.82 v1(46.7,16.3)
CHASSIS_ETHERNET: length 4.6
  TOP w0.3: R20.2 20.6,30.5 C41.2 19.3,30.5 18.7,31.1 C40.2
CHASSIS_USB: length 32.2
  TOP w0.3: 4.15,18.25 4.15,17.85 4.75,17.25 R10.2 ; 4.15,18.25 J5.7 ; 4.15,18.25 C20.2 ; v3(7.5,21.44) 7.35,21.44 7.05,21.74 D4.2
  BOTTOM w0.254: 0.6,25.12 1.25,26.18 ; 1.25,26.18 2.55,26.18 ; 1.25,26.18 1.25,25.07 ; 1.25,26.18 2.55,25.17 ; J5.11 2.55,20.47 ; J5.11 2.55,19.46 ; J5.11 1.25,20.57 ; J5.11 1.9,20.52 ; 4.15,24.17 J5.6 ; J5.6 5.09,24.17 ; J5.6 3.21,26.47 ; J5.6 3.21,24.17 ; J5.6 3.13,25.32 ; J5.6 4.15,26.47 ; J5.7 4.15,21.47 ; J5.7 3.13,20.32 ; J5.7 3.21,19.17 ; J5.7 3.21,21.47 ; J5.7 4.15,19.17
D0: length 35.9
  TOP w0.15: U4.64 50.28,28.81 51.19,29.72 52.55,29.72 53.04,29.24 53.86,29.24 54.7,30.08 54.7,31.21 53.95,31.96 53.95,34.96 52.1,36.81 52.1,44.7 55,47.59 60.3,47.59 J2.1
D1: length 35.2
  TOP w0.15: v1(61.25,47.7) 60.81,47.27 55.09,47.27 52.4,44.58 52.4,36.93 54.43,34.9 54.43,31.9 55,31.33 55,29.96 53.98,28.94 52.91,28.94 52.43,29.42 51.32,29.42 50.78,28.89 U4.63
  BOTTOM w0.15: J2.2 60.96,49.53 61.25,49.24 v1(61.25,47.7)
D2: length 47.3
  TOP w0.15: U4.26 57.68,14.08 55.99,15.78 55.79,15.78 54.48,17.08 54.07,17.08 v1(52.25,18.9)
  BOTTOM w0.15: v1(52.25,18.9) 49.59,18.9 48.65,19.84 48.65,20.26 48.65,23.3 50.73,25.38 50.73,26.04 50.71,26.07 50.71,29.81 54.35,33.45 54.35,34.69 58.42,38.76 J2.3
D3: length 48.8
  TOP w0.15: U4.25 56.78,13.24 55.49,14.52 55.22,14.52 53.91,15.82 51.88,15.82 v1(49.9,17.8)
  BOTTOM w0.15: J2.4 58,48.68 58,38.77 54.05,34.82 54.05,34.42 49.69,30.06 49.69,29.51 50.41,28.79 50.41,25.94 50.43,25.92 50.43,25.5 48.35,23.42 48.35,20.48 48.35,19.35 v1(49.9,17.8)
D4: length 28.6
  TOP w0.15: v1(57.5,46.5) 57.5,45.73 53.6,41.83 53.6,37.43 57.1,33.93 57.1,32.95 56.78,32.63 U4.51
  BOTTOM w0.15: v1(57.5,46.5) 57.5,47.85 56.25,49.1 55.04,49.1 J2.5
D5: length 48.5
  TOP w0.15: J2.6 50.8,37.21 51.55,36.46 51.55,36.04 51.26,35.75 49.8,35.75 v1(46.85,32.8) ; U4.95 42.18,16.58 42.11,16.65 41.94,16.65 v1(41.9,16.7)
  L2-GND w0.15: v1(46.85,32.8) 46.85,27.06 45.38,25.59 38.68,25.59 37.64,24.54 37.64,21.26 39.95,18.95 39.95,17.6 40.48,17.07 41.53,17.07 v1(41.9,16.7)
D6: length 40.2
  TOP w0.15: U4.96 43.88,16.08 46,18.2 v1(46,20.05) ; J2.7 48.26,39.04 49.53,37.77 49.78,37.77 v1(50.15,37.4)
  L2-GND w0.15: v1(50.15,37.4) 50.2,37.4 50.35,37.25 50.35,37.1 50.85,36.6 50.85,33.82 51.35,33.32 51.35,29.5 51,29.15 51,27.85 49.43,26.28 49.43,25.5 49.5,25.43 49.5,23.55 v1(46,20.05)
D7: length 51.4
  TOP w0.15: U4.24 56.28,13.28 55.34,14.22 55.1,14.22 53.82,15.49 51.48,15.49 49.39,17.58 v1(49.21,17.58)
  TOP w0.18: J2.8 42.75,47.83 v1(42.75,44.1)
  BOTTOM w0.15: v1(42.75,44.1) 42,43.35 41.77,43.35 41.15,42.73 41.15,36.98 39,34.83 39,34.08 39.55,33.53 39.55,32.3 42,29.85 42,28.57 43.17,27.4 45.26,27.4 45.8,26.86 45.8,25.8 48.05,23.55 48.05,20.6 48.05,18.74 v1(49.21,17.58)
D8: length 50.2
  TOP w0.15: U4.23 55.78,13.32 55.18,13.92 54.97,13.92 53.72,15.16 51.34,15.16 49.57,16.94 v1(48.87,16.94)
  TOP w0.18: J3.1 41.66,47.34 41.99,47.01 v1(41.99,44.23)
  BOTTOM w0.15: v1(48.87,16.94) 48.25,17.56 48.25,18.11 47.75,18.61 47.75,20.72 47.75,23.26 46.61,24.4 45.45,25.56 45.45,26.71 45.06,27.1 43.04,27.1 41.67,28.47 41.67,29.71 39.22,32.16 39.22,33.43 38.7,33.95 38.7,34.96 40.85,37.11 40.85,43.09 v1(41.99,44.23)
D9: length 46.4
  TOP w0.15: v1(47.42,16.36) 47.42,15.67 46.28,14.53 U4.4 ; v1(41.4,44.65) 41.4,46.9 39.12,49.18 J3.2
  BOTTOM w0.15: v1(47.42,16.36) 47.95,16.89 47.95,17.99 47.45,18.49 47.45,20.85 47.45,23.14 46.49,24.1 43.89,26.7 43.02,26.7 41.2,28.52 41.2,29.51 38.7,32.01 38.7,33.53 38.4,33.83 38.4,35.42 40.37,37.39 40.37,41.47 39.65,42.19 39.65,42.9 v1(41.4,44.65)
D10: length 54.6
  TOP w0.15: v1(46.3,43.6) 41.74,43.6 40.9,44.44 40.9,46.48 J3.3 ; U4.47 56.81,24.58 54.48,22.25 52.5,22.25 52.21,22.54 52.21,24.14 50.64,25.71 v1(49.93,25.71)
  BOTTOM w0.15: v1(49.93,25.71) 49.93,28.72 49.39,29.26 49.39,30.18 53.75,34.54 53.75,34.94 55.7,36.89 55.7,41.25 53.35,43.6 v1(46.3,43.6)
D11: length 58.3
  TOP w0.15: v1(55.1,46.47) 55.1,45.82 52.7,43.42 52.7,37.06 55.27,34.49 55.27,32.03 55.3,32 ; 55.3,32 55.3,31.5 55.35,31.45 55.35,28.84 55.28,28.77 U4.54 ; 55.3,32 v1(55.3,32)
  BOTTOM w0.15: J3.4 38.37,46.47 v1(55.1,46.47) ; v1(55.3,32) 56.3,32 57.42,33.12 60.7,33.12 62.38,31.44 62.38,29.39 62.6,29.16 64.91,29.16 J7.4
D12: length 56.5
  TOP w0.15: v1(55.78,45.97) 53,43.19 53,37.18 55.79,34.39 v1(55.79,33.42) 55.79,32.89 55.8,32.89 55.8,31.79 55.78,31.77 U4.53
  BOTTOM w0.15: v1(55.78,45.97) 37.88,45.97 34.45,49.4 32.9,49.4 J3.5 ; v1(55.79,33.42) 56.22,33.85 60.7,33.85 62.95,31.6 62.95,31.1 63.62,30.43 J7.1
D13: length 65.5
  TOP w0.15: v1(56.46,45.4) 53.3,42.24 53.3,37.3 56.6,34 v1(56.6,33.23) 56.6,33.16 56.28,32.84 U4.52
  BOTTOM w0.15: J7.3 62.7,28.84 62.5,28.84 62.05,29.29 62.05,31.35 60.58,32.82 57.54,32.82 56.23,31.5 55.09,31.5 54.8,31.79 54.8,32.21 55.45,32.86 56.23,32.86 v1(56.6,33.23) ; v1(56.46,45.4) 37.45,45.4 33.85,49 30.76,49 J3.6
JTCK: length 15.2
  TOP w0.15: v1(52.77,26.13) 52.24,26.13 52.09,26.28 51,26.28 50.77,26.51 48.82,26.51 48.39,26.08 U4.76
  BOTTOM w0.15: v1(52.77,26.13) 55.73,29.09 55.73,29.16 J8.4
JTDI: length 16.3
  TOP w0.15: U4.77 45.62,25.58 48.4,22.8 v1(50.43,22.8)
  BOTTOM w0.15: v1(50.43,22.8) 50.8,23.17 50.8,23.23 52.9,25.33 53.1,25.33 53.83,26.06 55.17,26.06 55.73,26.62 J8.8
JTDO: length 20.7
  TOP w0.15: v1(50.4,19.56) 49.41,20.55 45.79,20.55 44.82,19.58 U4.89
  BOTTOM w0.15: v1(50.4,19.56) 50.4,20.08 49.9,20.58 49.9,23.25 51.65,25 52.15,25 52.78,25.63 52.97,25.63 53.6,26.25 53.6,26.26 55.23,27.89 J8.6
